# Altium PCB PCB.PcbDoc (part 1 of 3)
Units mm, origin at the board's own origin, x right, y up, seen from the top; angles counter-clockwise.
Board outline 50 x 32.5 mm, 10 copper layers (Top (GND), L2 (HS), L3 (GND), L4 (VCC), L5 (S), L6 S(), L7 (VCC), L8 (GND), L9 (VCC), Bottom (S)), stack 1.18 mm thick; 115 components, 126 nets, 603 pads, 417 vias.
Unrouted connection lines stored in the file: 2.
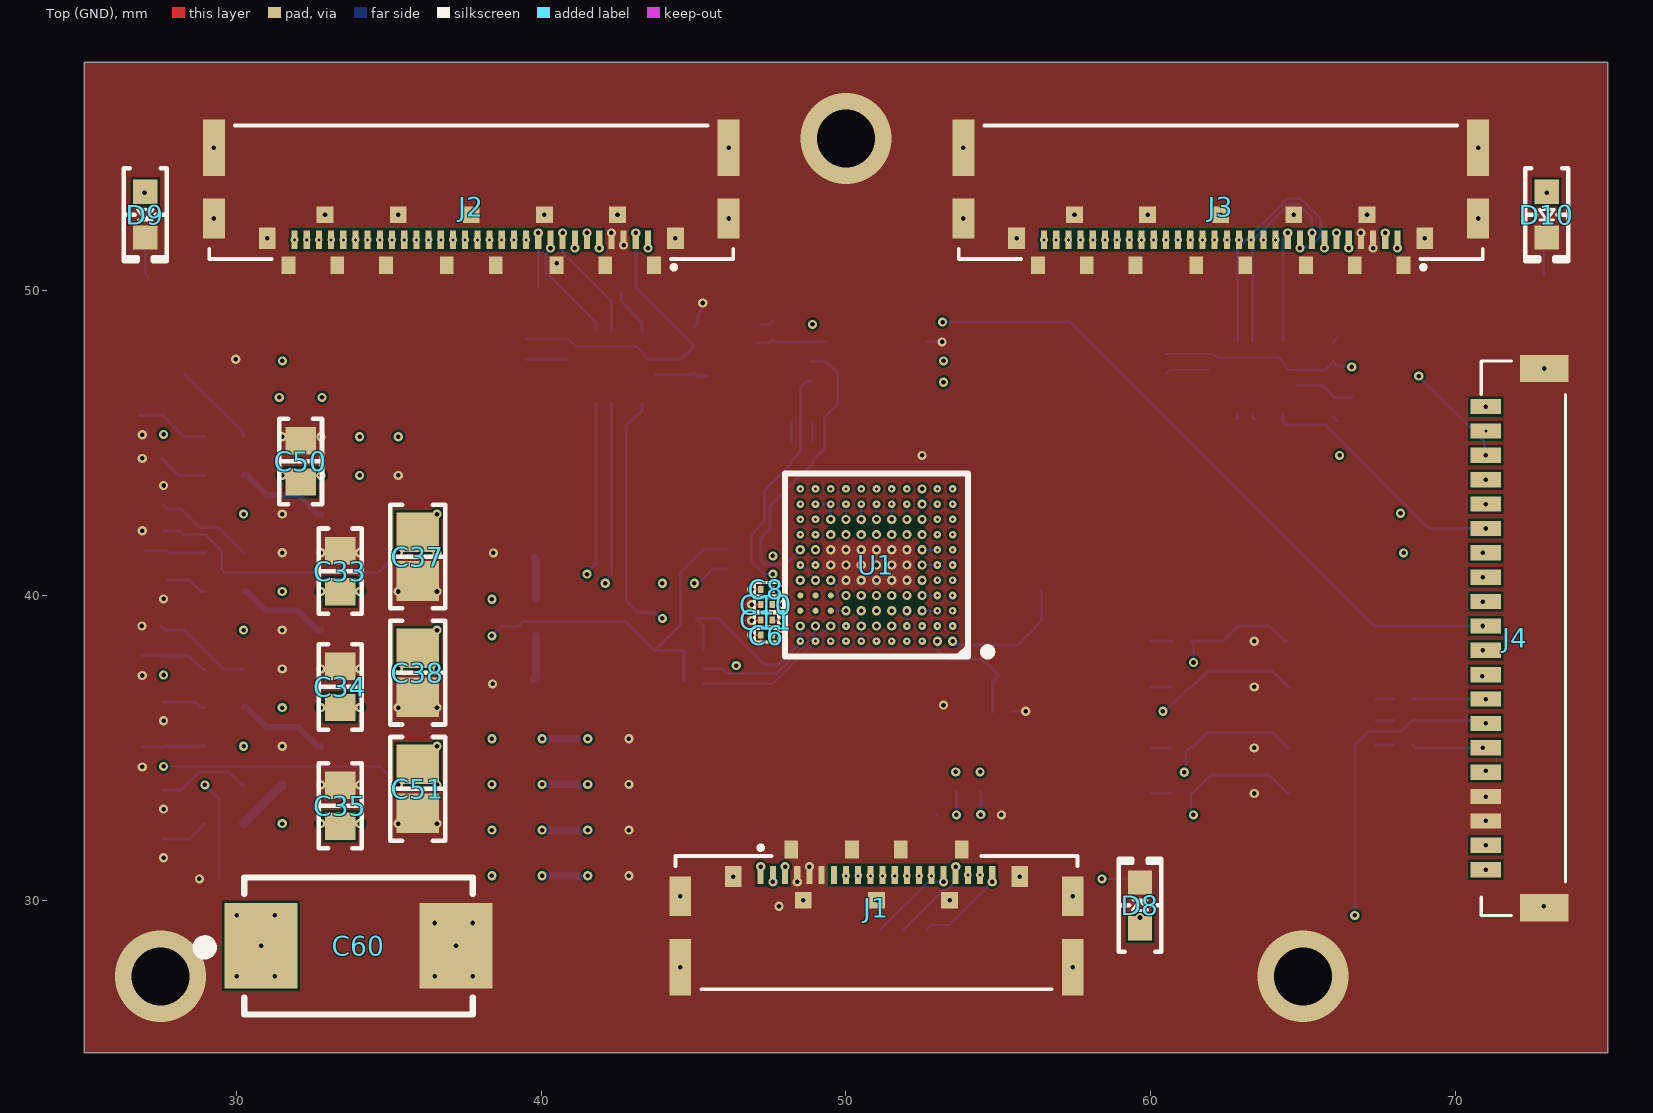
[diagram p0: Top (GND) view]
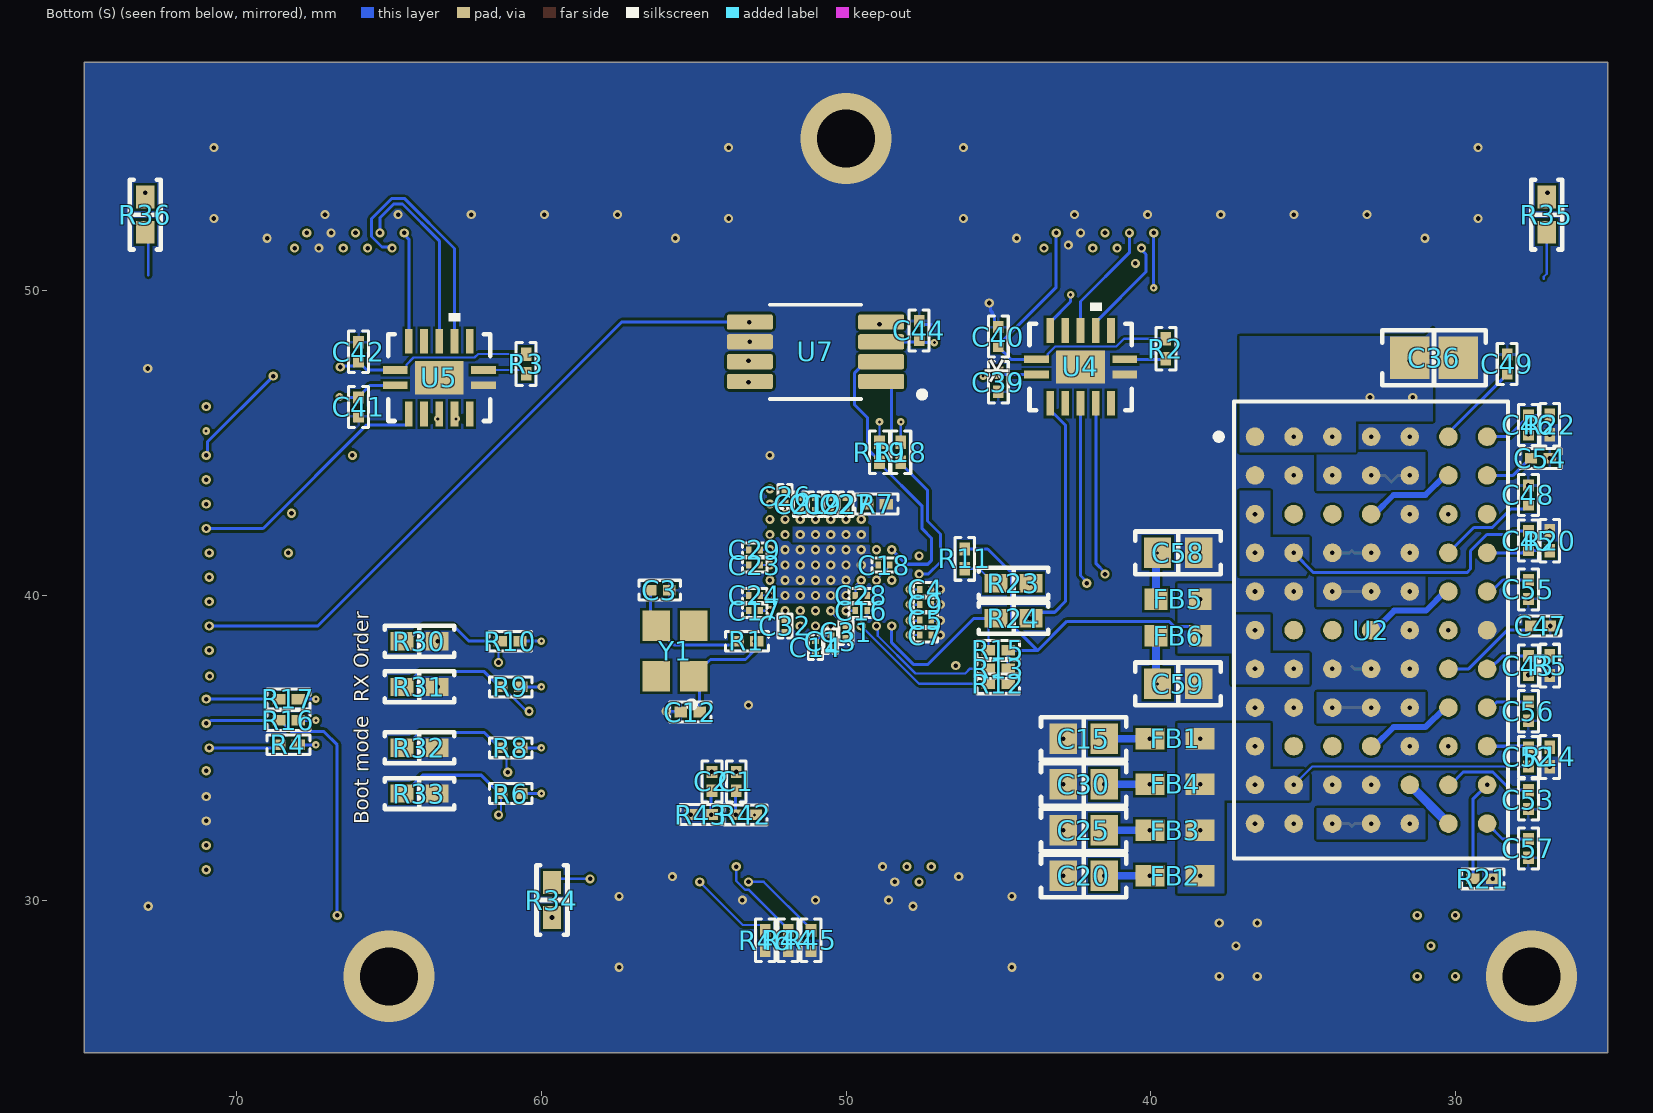
[diagram p1: Bottom (S) view, seen from below]
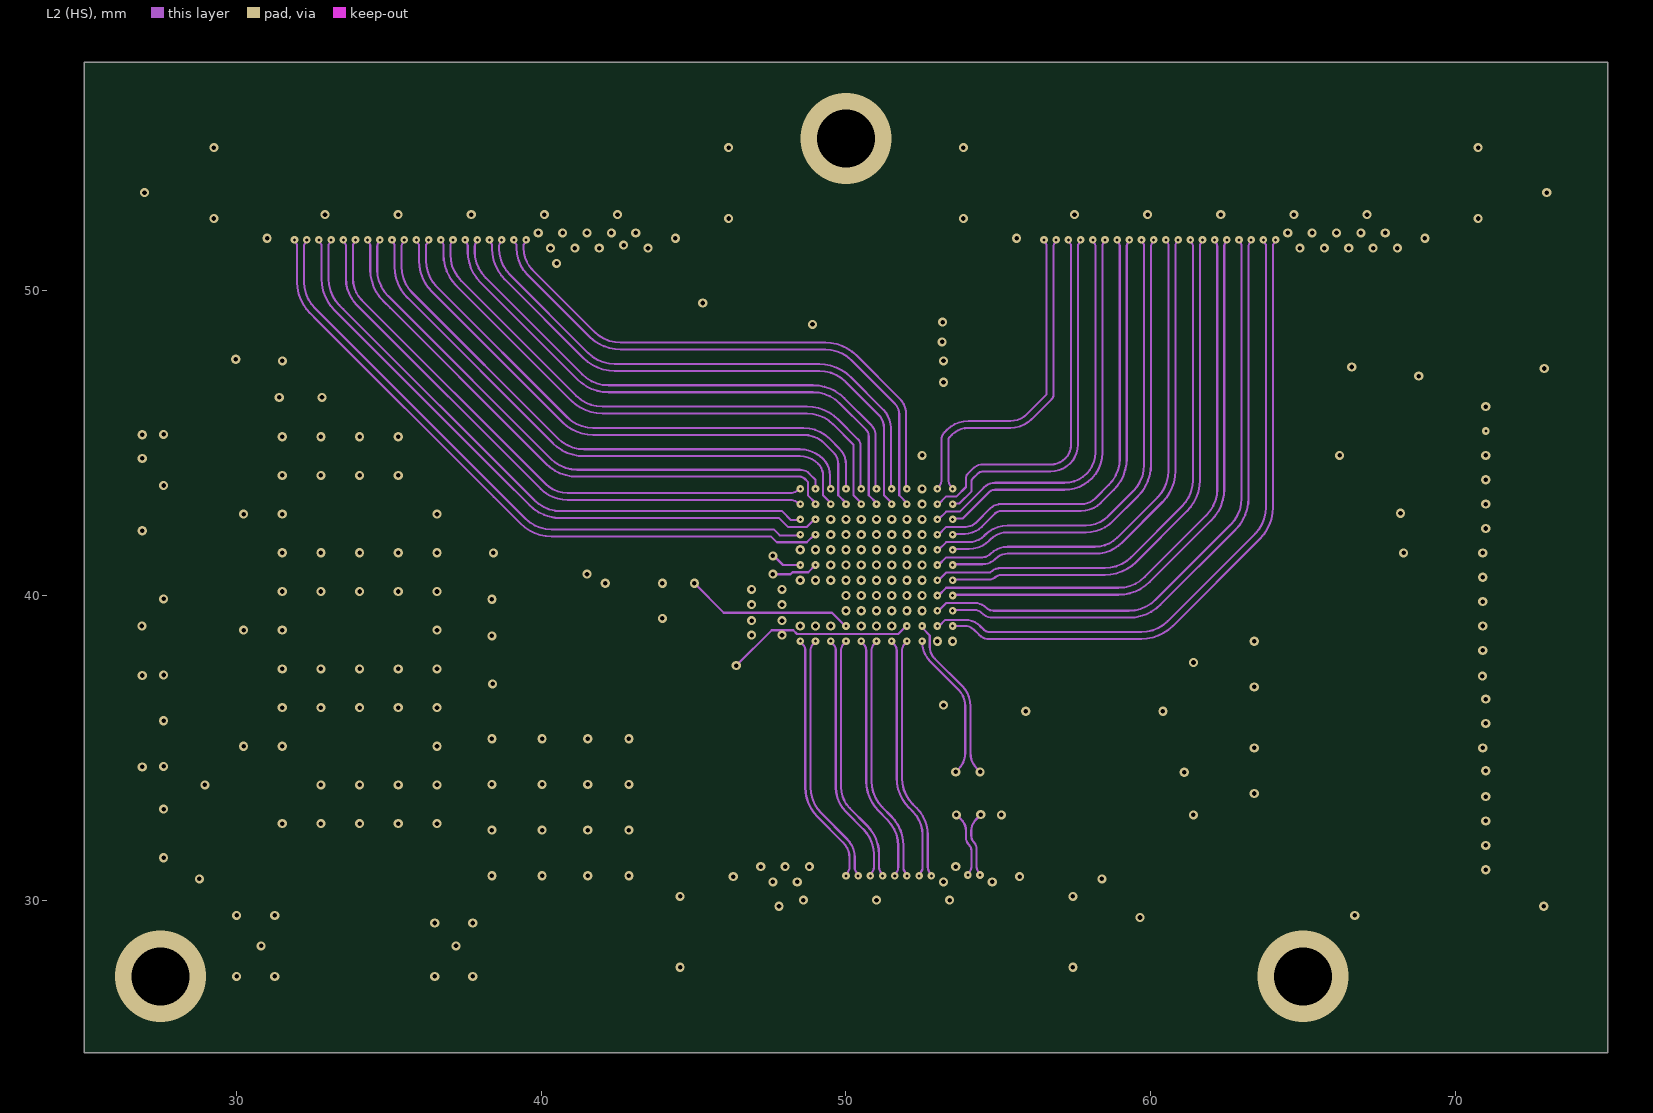
[diagram p2: L2 (HS)]
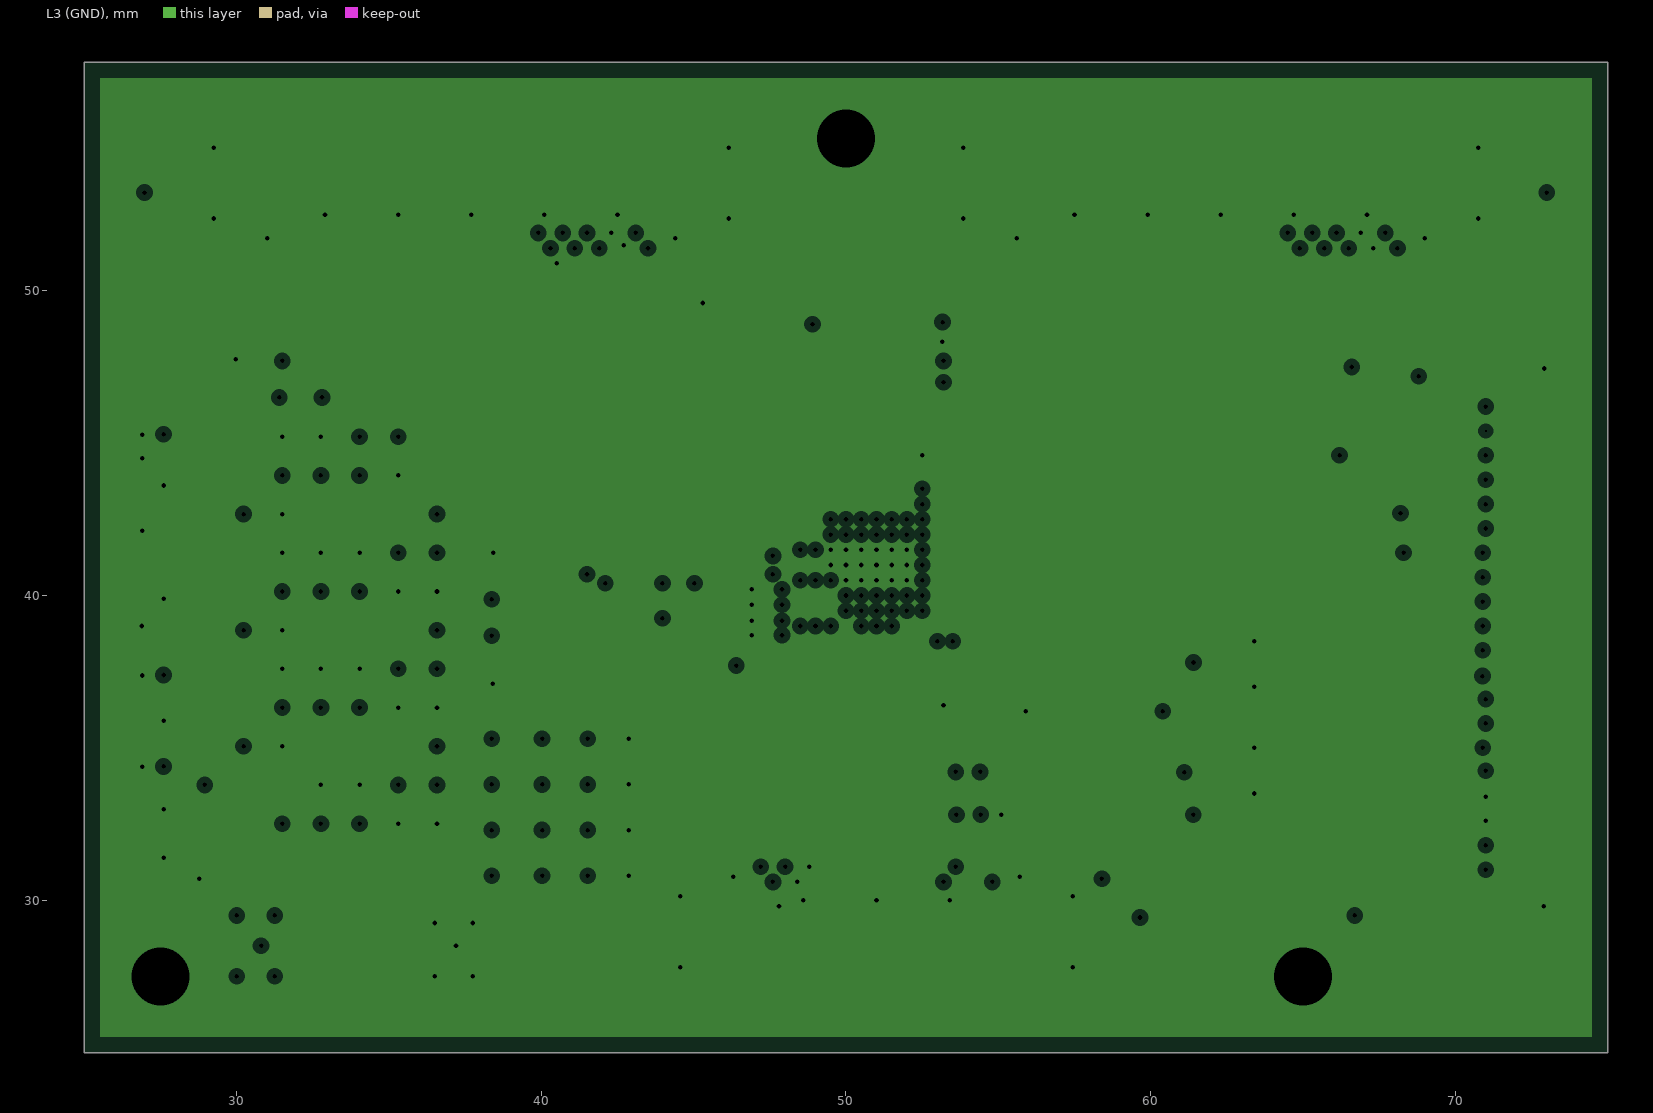
[diagram p3: L3 (GND), clearances drawn from the general rule]
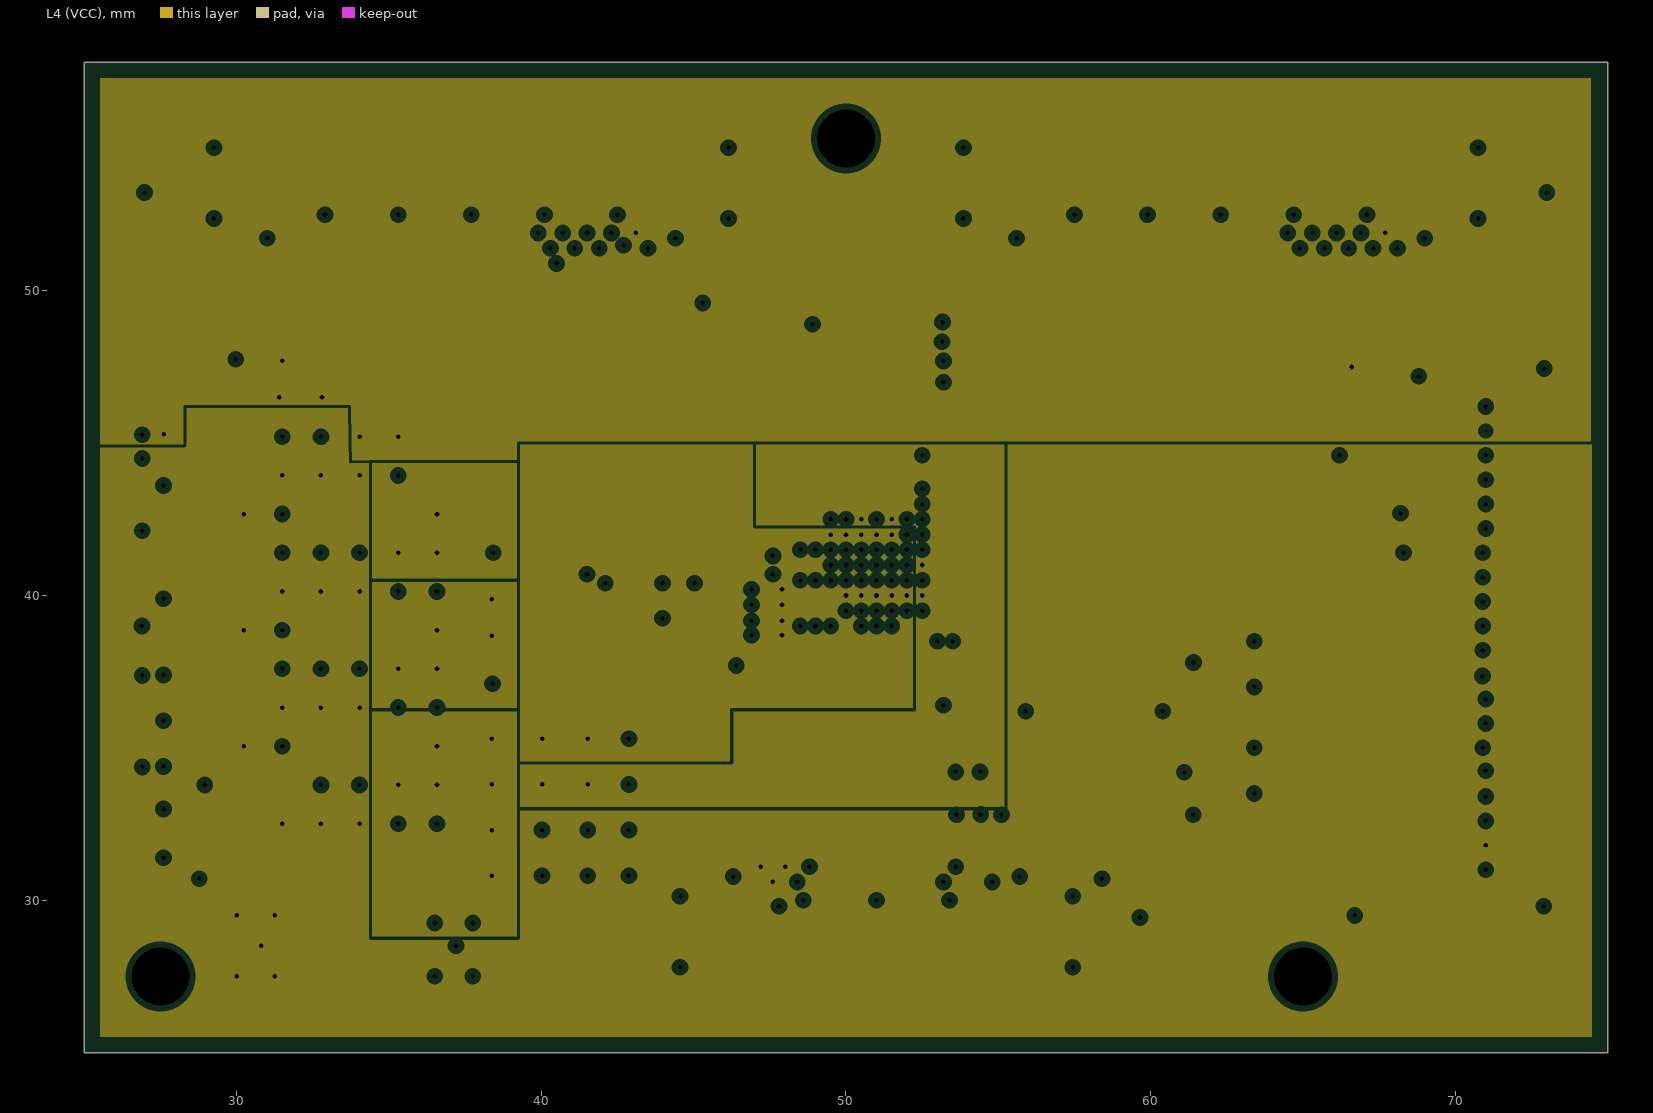
[diagram p4: L4 (VCC), clearances drawn from the general rule]
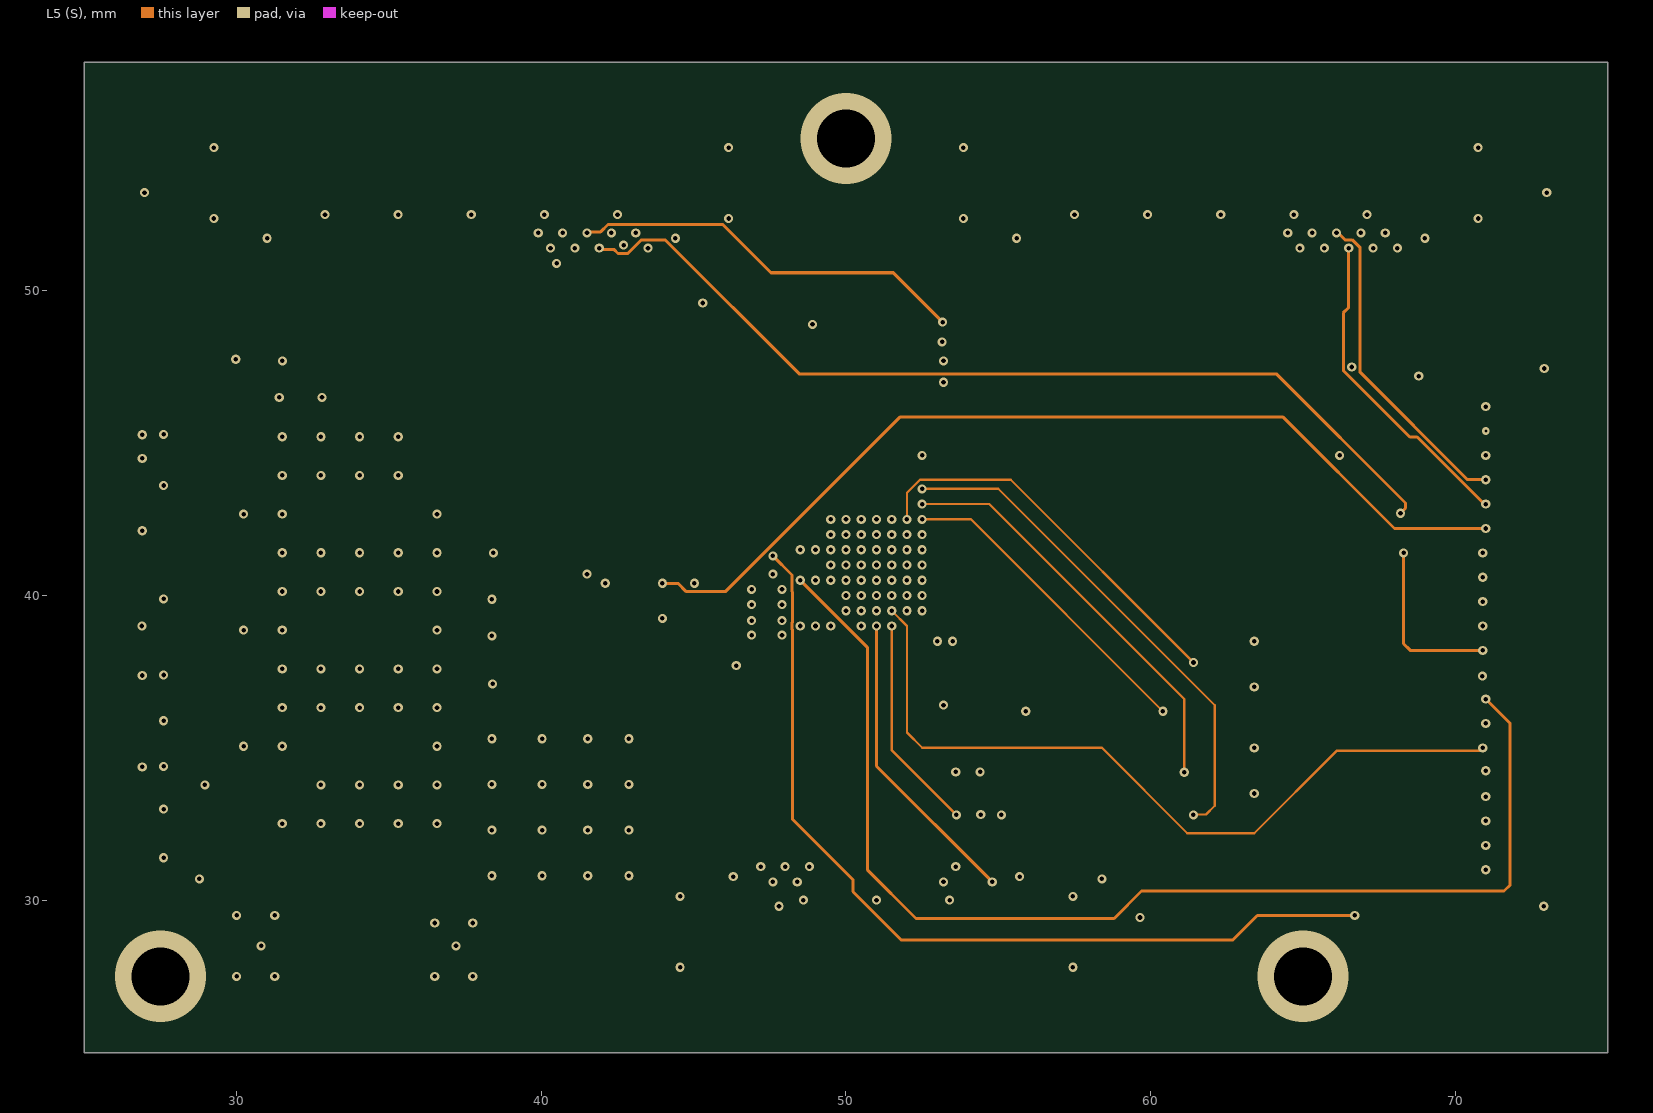
[diagram p5: L5 (S)]
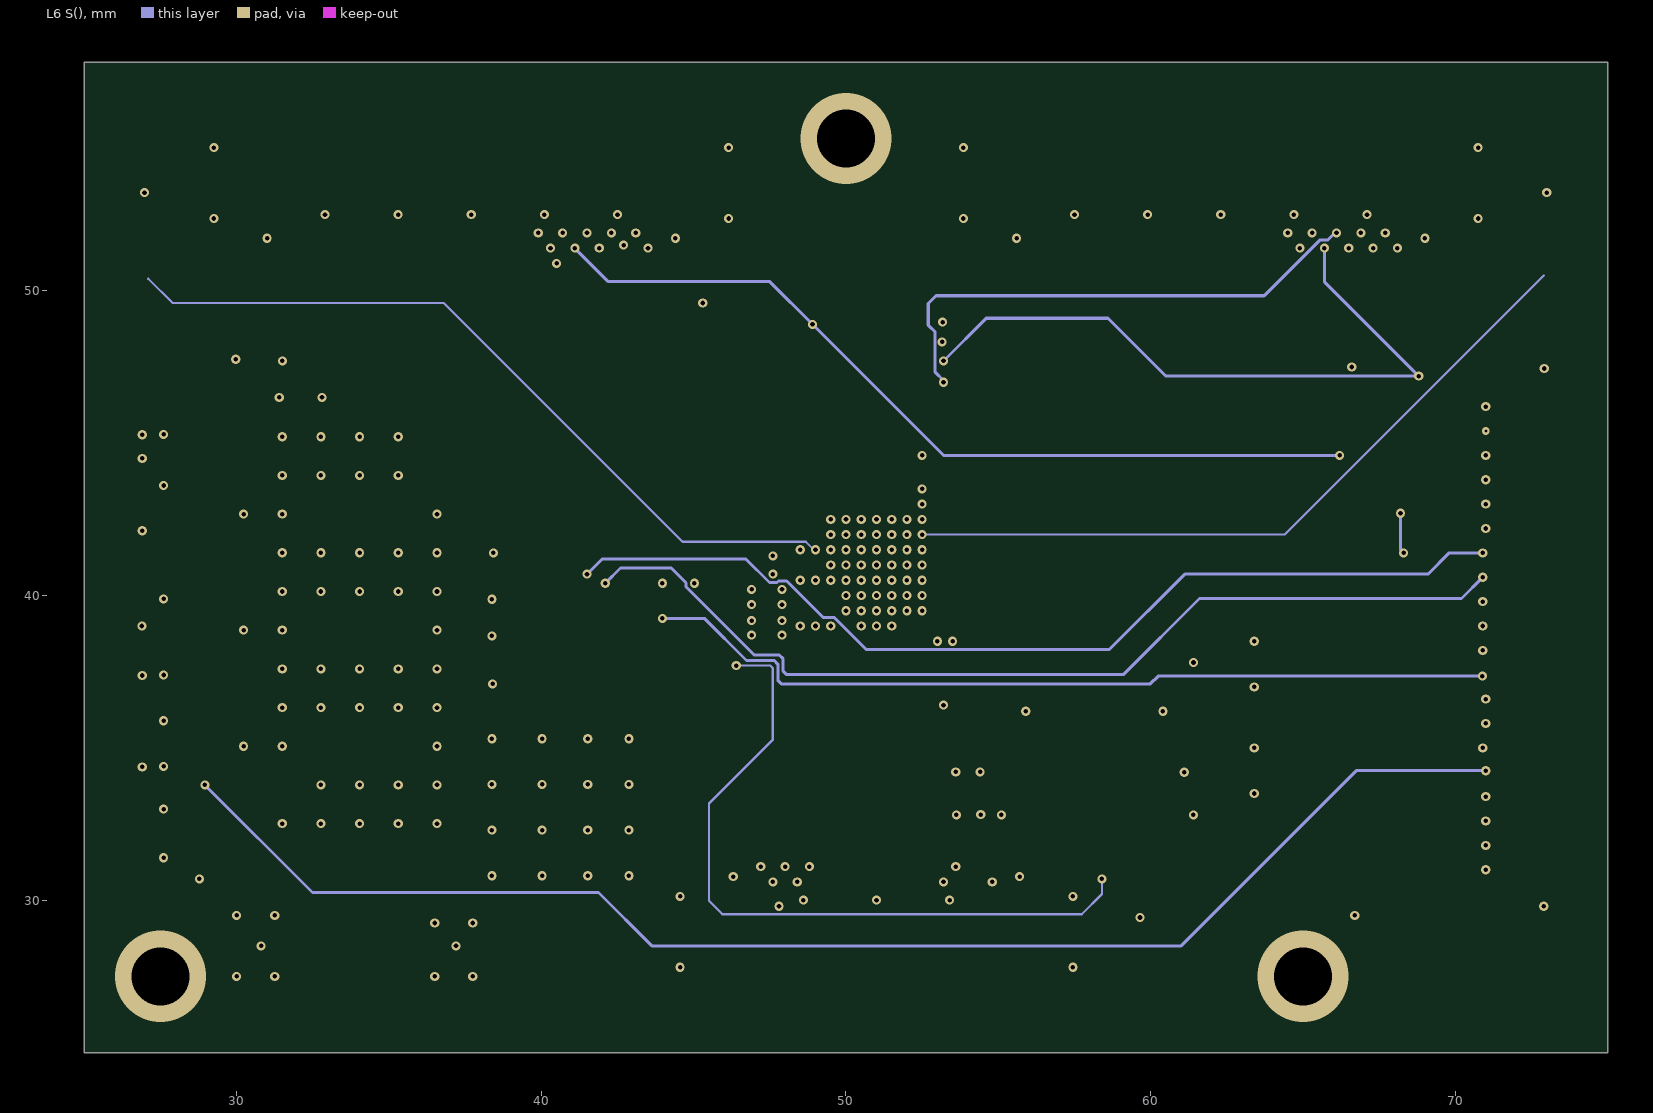
[diagram p6: L6 S()]
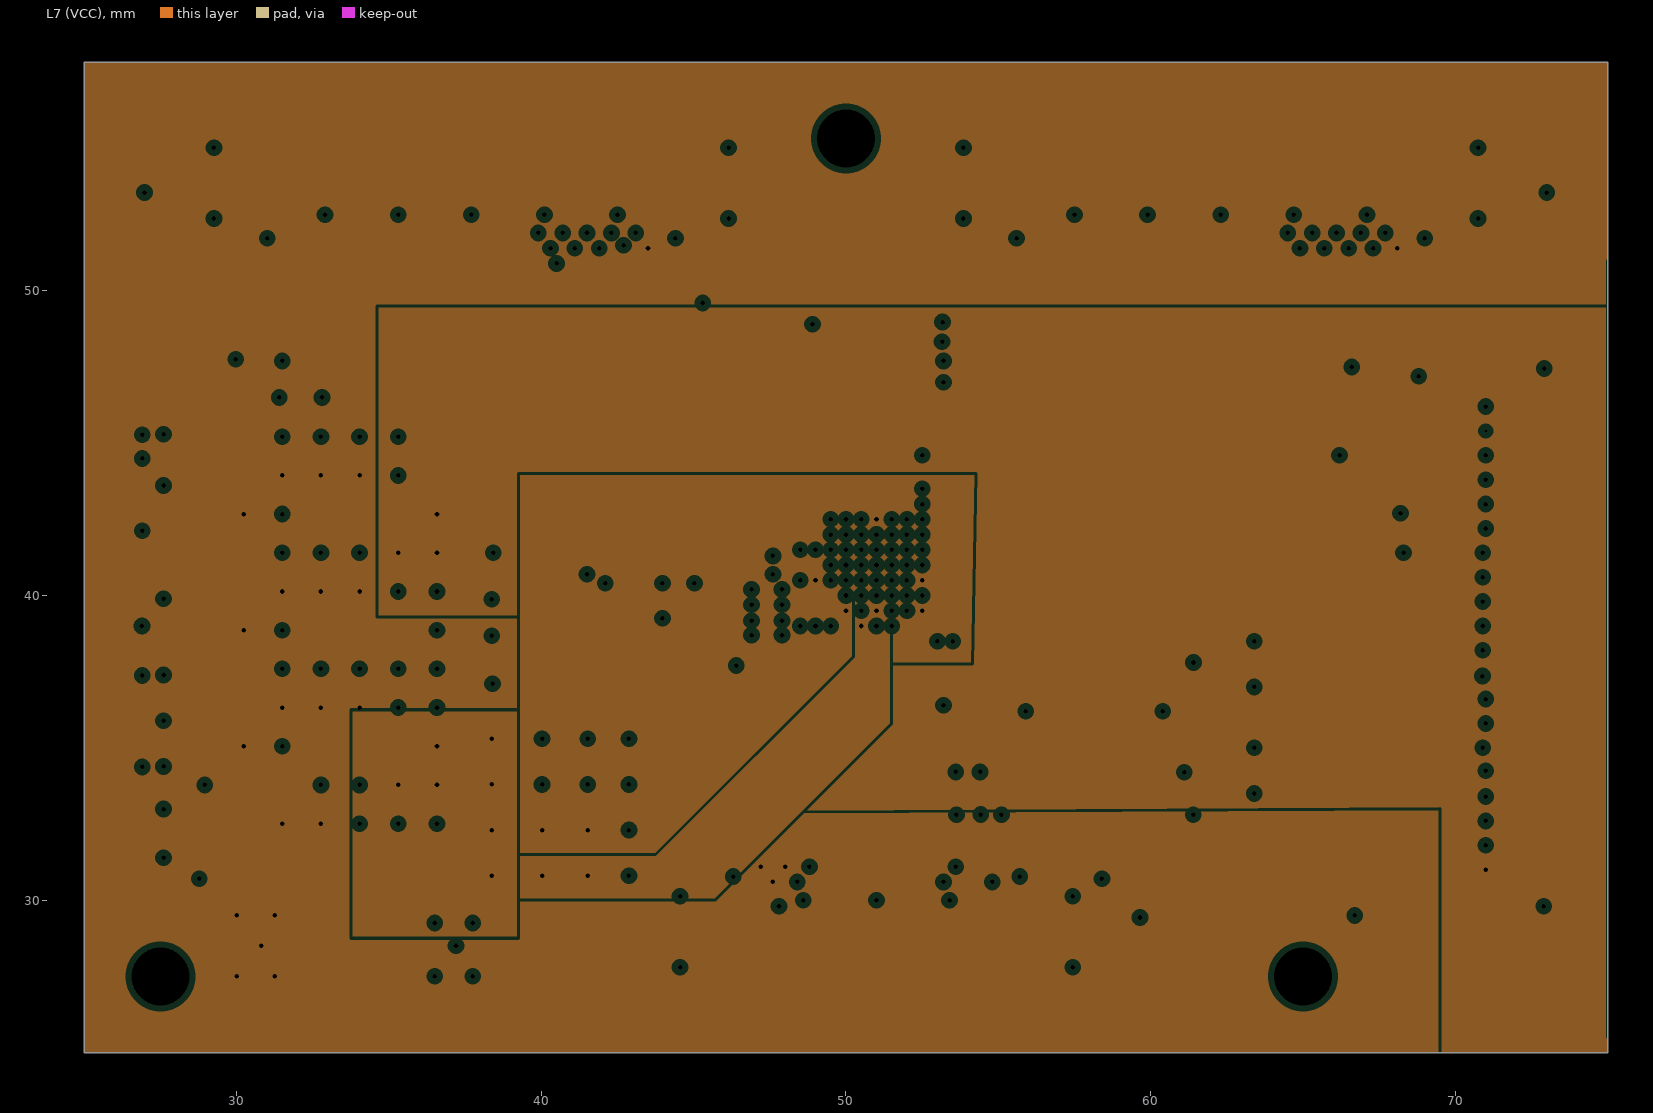
[diagram p7: L7 (VCC), clearances drawn from the general rule]
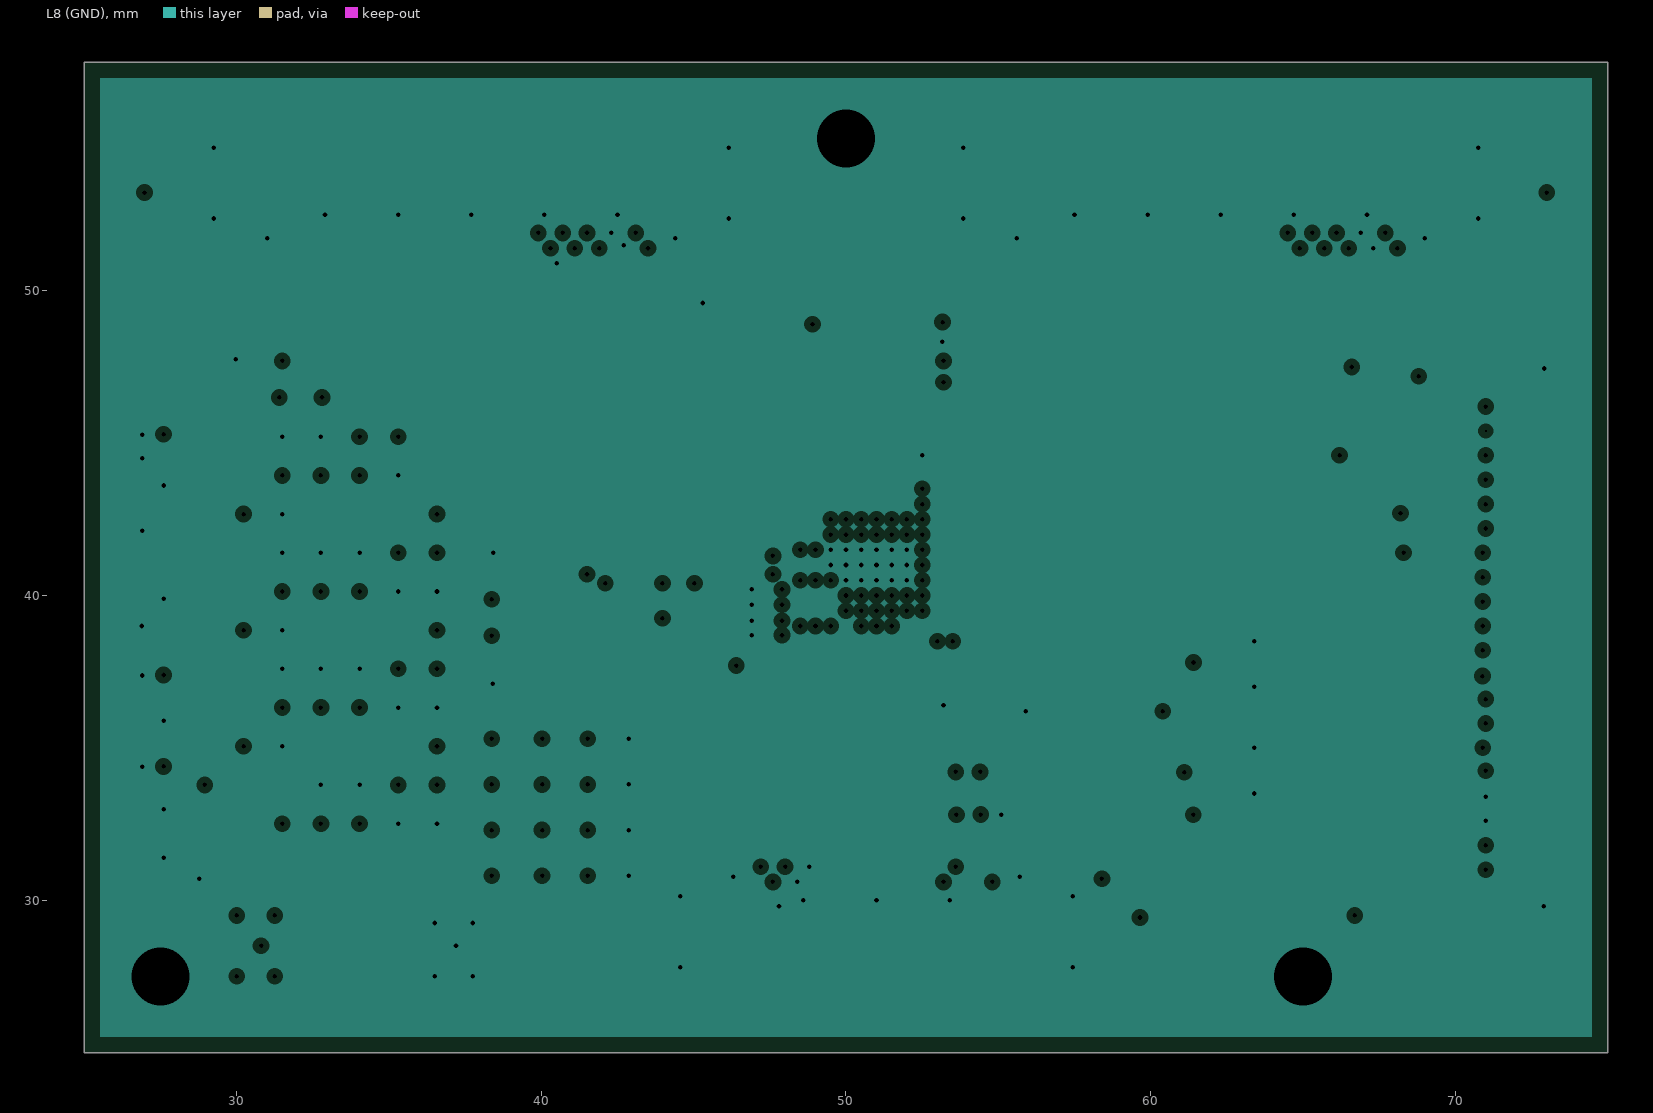
[diagram p8: L8 (GND), clearances drawn from the general rule]
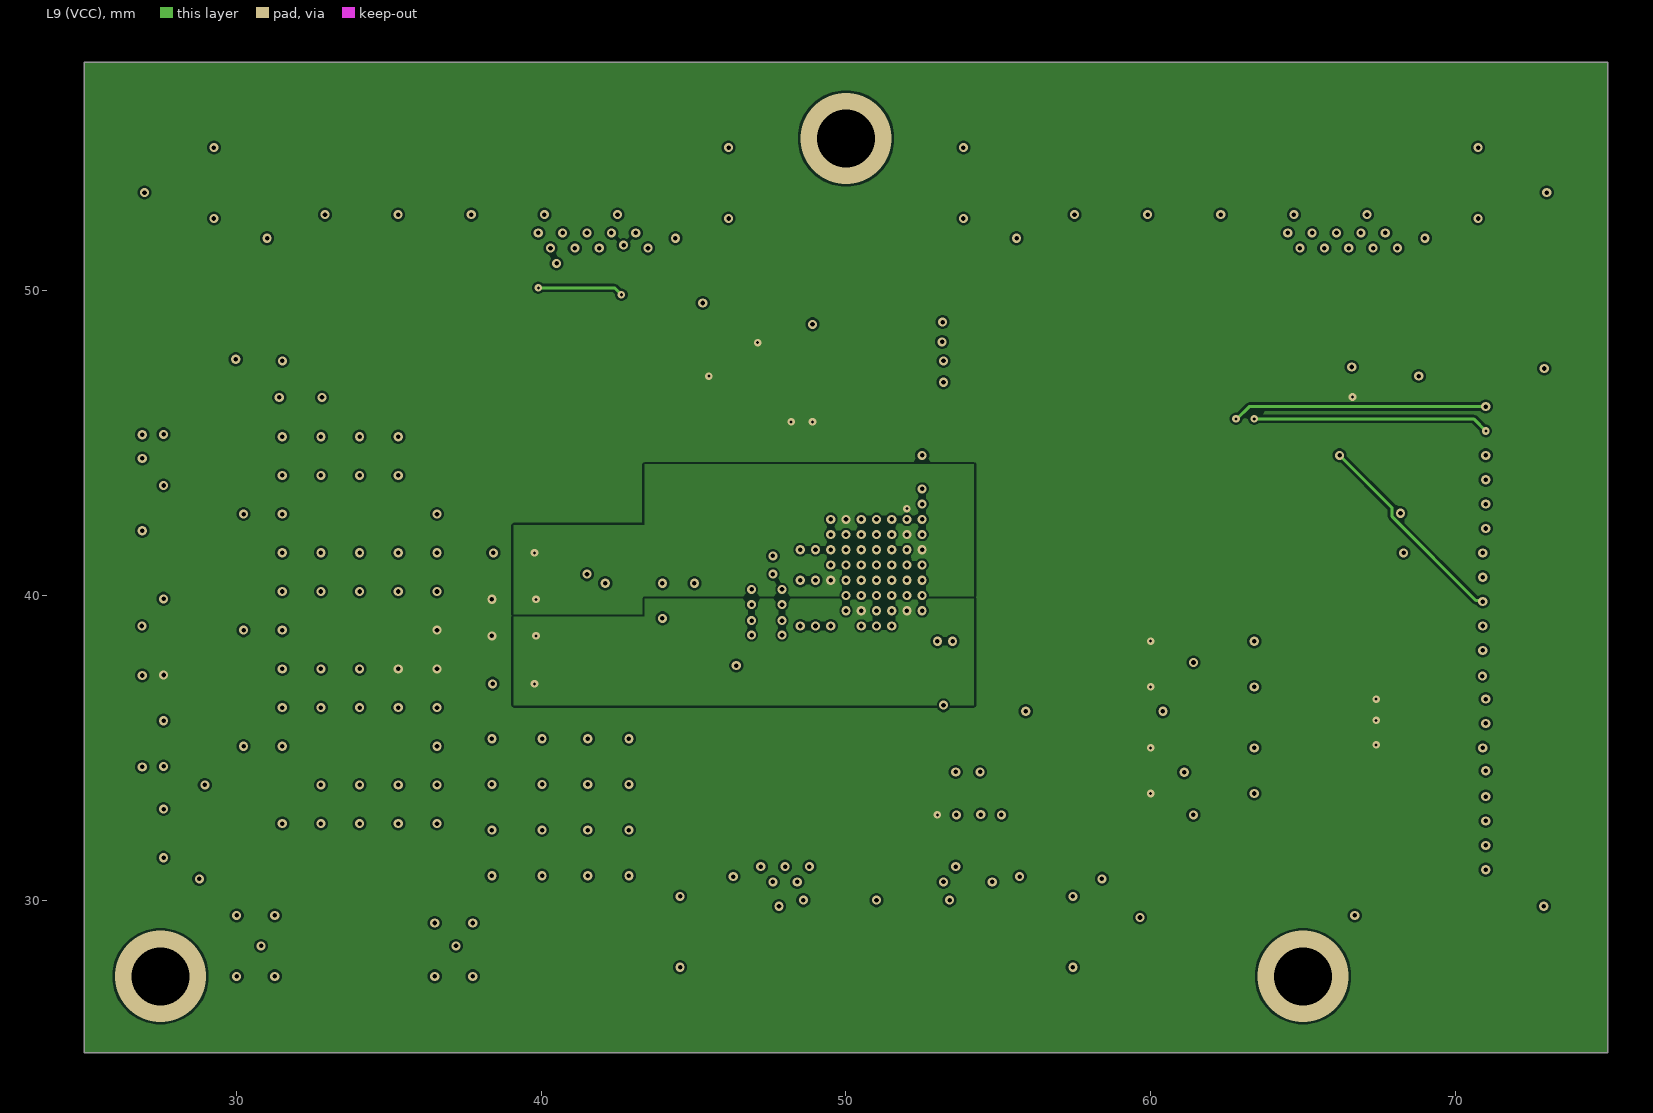
[diagram p9: L9 (VCC)]

## Layer stack, top to bottom
Top Solder: solder mask 0.015, WE-SM-0001, Dk 3.5
Top (GND): signal copper 0.03
Dielectric 1: prepreg 0.1, WE-PP-0034, Dk 3.5
L2 (HS): signal copper 0.03
Dielectric 2: prepreg 0.1, WE-PP-0035, Dk 3.7
L3 (GND): plane copper 0.035, net GND
Core 1: core 0.05, WE-CO-0041, Dk 3.8
L4 (VCC): plane copper 0.035, net (Multiple Nets)
Dielectric 3: prepreg 0.1, WE-PP-0035, Dk 3.7
L5 (S): signal copper 0.035
Dielectric 6: core 0.15, Core-009, Dk 3.8
L6 S(): signal copper 0.035
Dielectric 7: prepreg 0.1, PP-006, Dk 3.7
L7 (VCC): plane copper 0.035, net (Multiple Nets)
Core 2: core 0.05, WE-CO-0041, Dk 3.8
L8 (GND): plane copper 0.035, net GND
Dielectric 4: prepreg 0.1, WE-PP-0035, Dk 3.7
L9 (VCC): signal copper 0.03
Dielectric 5: prepreg 0.1, WE-PP-0034, Dk 3.5
Bottom (S): signal copper 0.03
Bottom Solder: solder mask 0.015, WE-SM-0001, Dk 3.5

## Board outline
25,25 75,25 75,57.5 25,57.5

## Design rules (kind name [scope] priority, off if disabled: settings)
Clearance Clearance_1 [All] p1: gap=0.075 ignorepadtopadclearanceinfootprint=TRUE except(0.3: Arc-Arc Arc-Track Track-Track)
Clearance [All] p2: gap=0.075 ignorepadtopadclearanceinfootprint=TRUE
ComponentClearance [All] p1: gap=0 collisioncheckmode=3 verticalgap=0 showdistances=FALSE
DiffPairsRouting [InDifferentialPairClass('DP')] p1: maxlimit=0.127 minlimit=0.1 mostfreqgap=0.127 toplayer_mingap=0.127 toplayer_minwidth=0.167 toplayer_maxwidth=0.167 toplayer_prefwidth=0.167 midlayer1_maxgap=0.1 midlayer1_prefgap=0.1 midlayer1_minwidth=0.071 midlayer1_maxwidth=0.071 midlayer1_prefwidth=0.071 midlayer2_mingap=0.127 midlayer2_minwidth=0.082 midlayer2_maxwidth=0.082 midlayer2_prefwidth=0.082 midlayer3_mingap=0.127 midlayer3_minwidth=0.083 midlayer3_maxwidth=0.083 midlayer3_prefwidth=0.083 midlayer4_mingap=0.127 midlayer4_minwidth=0.083 midlayer4_maxwidth=0.083 midlayer4_prefwidth=0.083 bottomlayer_mingap=0.127 bottomlayer_minwidth=0.167 bottomlayer_maxwidth=0.167 bottomlayer_prefwidth=0.167 impedanceprofiledriven=TRUE impedanceprofileid={AE4447DF-5068-432C-BB46-7875F6B4D314} impedanceprofilevalue=90.000000 maxuncoupledlength=12.7
DiffPairsRouting DiffPairsRouting_1 [InDifferentialPairClass('MIPI')] p2: maxlimit=0.254 minlimit=0.16 mostfreqgap=0.254 toplayer_maxgap=0.16 toplayer_prefgap=0.16 toplayer_minwidth=0.145 toplayer_maxwidth=0.145 toplayer_prefwidth=0.145 midlayer1_maxgap=0.16 midlayer1_prefgap=0.16 midlayer1_minwidth=0.068 midlayer1_maxwidth=0.068 midlayer1_prefwidth=0.068 midlayer3_maxgap=0.16 midlayer3_prefgap=0.16 midlayer3_minwidth=0.07 midlayer3_maxwidth=0.07 midlayer3_prefwidth=0.07 midlayer4_maxgap=0.16 midlayer4_prefgap=0.16 midlayer4_minwidth=0.07 midlayer4_maxwidth=0.07 midlayer4_prefwidth=0.07 bottomlayer_maxgap=0.16 bottomlayer_prefgap=0.16 bottomlayer_minwidth=0.145 bottomlayer_maxwidth=0.145 bottomlayer_prefwidth=0.145 impedanceprofiledriven=TRUE impedanceprofileid={08CC0214-7819-417F-93F2-0E958FEFD746} impedanceprofilevalue=100.000000 maxuncoupledlength=12.7
HoleSize [All] p1: absolutevalues=TRUE maxlimit=6.35 minlimit=0.15 maxpercent=80.000 minpercent=20.000
HoleToHoleClearance [All] p1: gap=0.1 allowstackedmicrovias=TRUE
MatchedLengths MatchedLengths_3 [All] p1: tolerance=0.127 checknetsindiffpair=TRUE checkdiffpairvsdiffpair=FALSE checkxsignals=FALSE checkothers=FALSE
MatchedLengths MatchedLengths_2 [InDifferentialPairClass('MIPI')] p2: tolerance=12.7 checknetsindiffpair=FALSE checkdiffpairvsdiffpair=TRUE checkxsignals=TRUE checkothers=TRUE
MatchedLengths MatchedLengths_1 [InDifferentialPairClass('DP')] p3: tolerance=0.05 checknetsindiffpair=TRUE checkdiffpairvsdiffpair=FALSE checkxsignals=FALSE checkothers=FALSE
MatchedLengths [InDifferentialPairClass('DP')] p4: tolerance=5 checknetsindiffpair=FALSE checkdiffpairvsdiffpair=TRUE checkxsignals=TRUE checkothers=TRUE
MinimumSolderMaskSliver [All] p1: minsoldermaskwidth=0.075
ParallelSegment ParallelSegment_1 [InNetClass('MIPI') vs InNetClass('MIPI')] p1: limit=2 gap=0.1
ParallelSegment [InNetClass('DP') vs InNetClass('DP')] p2: limit=2 gap=0.1
PlaneClearance PlaneClearance_2 [ViaDiameter <= 0.3] p1: clearance=0.15
PlaneClearance PlaneClearance_1 [ViaSize > 0.4] p2: clearance=0.508
PlaneClearance [All] p3: clearance=0.2
PlaneConnect [All] p1: planeconnectstyle=Direct reliefexpansion=0.508 reliefentries=4 reliefconductorwidth=0.254 reliefairgap=0.254
PolygonConnect PolygonConnect_1 [HasFootprint('CAP 01005_0402') OR HasFootprint('CAP 0201_0603')] p1: connectstyle=Relief reliefconductorwidth=0.1 reliefentries=4 polygonreliefangle="90 Angle" airgapwidth=0.1
PolygonConnect [All] p2: connectstyle=Direct reliefconductorwidth=0.254 reliefentries=4 polygonreliefangle="90 Angle" airgapwidth=0.254
ReturnPath ReturnPath_1 [All] p1: impedanceprofileid={08CC0214-7819-417F-93F2-0E958FEFD746} _gaplimit=0.3 _useantipads=TRUE
ReturnPath [InNetClass('DP')] p2: impedanceprofileid={AE4447DF-5068-432C-BB46-7875F6B4D314} _gaplimit=0.4 _useantipads=TRUE
RoutingVias RoutingVias_1 [IsMicroVia] p1: holewidth=0.1 width=0.325 viastyle="Through Hole" minholewidth=0.1 minwidth=0.25 maxholewidth=0.1 maxwidth=0.325
RoutingVias [All] p2: holewidth=0.2 width=0.4 viastyle="Through Hole" minholewidth=0.15 minwidth=0.3 maxholewidth=0.25 maxwidth=0.5
SolderMaskExpansion [All] p1: expansion=0.05 istentingtop=FALSE
UnRoutedNet [All] p1: checkbadconnections=TRUE
ViasUnderSMD [All] p1: allowed=TRUE
Width [All] p1: maxlimit=1 minlimit=0.075 preferedwidth=0.1
22 further rules are at their usual default settings.

## Classes and differential pairs
differential pair class MIPI: TX0_D0_0 TX0_D0_1 TX0_D0_2 TX0_D0_3 TX0_D0_C TX0_D1_0 TX0_D1_1 TX0_D1_2 TX0_D1_3 TX0_D1_C TX1_D0_0 TX1_D0_1 TX1_D0_2 TX1_D0_3 TX1_D0_C TX1_D1_0 TX1_D1_1 TX1_D1_2 TX1_D1_3 TX1_D1_C
differential pair class DP: AUX DP0 DP1 DP2 DP3 RX_AUX
net class MIPI: TX0_D0_0_N TX0_D0_0_P TX0_D0_1_N TX0_D0_1_P TX0_D0_2_N TX0_D0_2_P TX0_D0_3_N TX0_D0_3_P TX0_D0_C_N TX0_D0_C_P TX0_D1_0_N TX0_D1_0_P TX0_D1_1_N TX0_D1_1_P TX0_D1_2_N TX0_D1_2_P TX0_D1_3_N TX0_D1_3_P TX0_D1_C_N TX0_D1_C_P TX1_D0_0_N TX1_D0_0_P TX1_D0_1_N TX1_D0_1_P TX1_D0_2_N TX1_D0_2_P TX1_D0_3_N TX1_D0_3_P TX1_D0_C_N TX1_D0_C_P TX1_D1_0_N TX1_D1_0_P TX1_D1_1_N TX1_D1_1_P TX1_D1_2_N TX1_D1_2_P TX1_D1_3_N TX1_D1_3_P TX1_D1_C_N TX1_D1_C_P
net class DP: AUX_N AUX_P DP0_N DP0_P DP1_N DP1_P DP2_N DP2_P DP3_N DP3_P RX_AUX_N RX_AUX_P
component class TX1: C41 C42 J3 R3 U5
component class TX0: C39 C40 J2 R2 R7 U4
component class Supplies_LTM4643: C33 C34 C35 C36 C37 C38 C43 C45 C46 C47 C48 C49 C50 C51 C52 C53 C54 C55 C56 C57 C60 R5 R14 R20 R21 R22 U2
component class RX_DP: C1 C2 J1 R42 R43 R44 R45 R46 U1
component class PDN: C4 C5 C6 C7 C8 C9 C10 C11 C13 C14 C15 C16 C17 C18 C19 C20 C21 C22 C23 C24 C25 C26 C27 C28 C29 C30 C31 C32 C58 C59 FB1 FB2 FB3 FB4 FB5 FB6
component class MCUConn: J4
component class Control: C3 C12 C44 D8 D9 D10 R1 R4 R6 R8 R9 R10 R11 R12 R13 R15 R16 R17 R18 R19 R23 R24 R30 R31 R32 R33 R34 R35 R36 U7 Y1
differential pair RX_AUX: +RX_AUX_P -RX_AUX_N
differential pair TX1_D1_C: +TX1_D1_C_P -TX1_D1_C_N
differential pair TX1_D1_3: +TX1_D1_3_P -TX1_D1_3_N
differential pair TX1_D1_2: +TX1_D1_2_P -TX1_D1_2_N
differential pair TX1_D1_1: +TX1_D1_1_P -TX1_D1_1_N
differential pair TX1_D1_0: +TX1_D1_0_P -TX1_D1_0_N
differential pair TX1_D0_C: +TX1_D0_C_P -TX1_D0_C_N
differential pair TX1_D0_3: +TX1_D0_3_P -TX1_D0_3_N
differential pair TX1_D0_2: +TX1_D0_2_P -TX1_D0_2_N
differential pair TX1_D0_1: +TX1_D0_1_P -TX1_D0_1_N
differential pair TX1_D0_0: +TX1_D0_0_P -TX1_D0_0_N
differential pair TX0_D1_C: +TX0_D1_C_P -TX0_D1_C_N
differential pair TX0_D1_3: +TX0_D1_3_P -TX0_D1_3_N
differential pair TX0_D1_2: +TX0_D1_2_P -TX0_D1_2_N
differential pair TX0_D1_1: +TX0_D1_1_P -TX0_D1_1_N
differential pair TX0_D1_0: +TX0_D1_0_P -TX0_D1_0_N
differential pair TX0_D0_C: +TX0_D0_C_P -TX0_D0_C_N
differential pair TX0_D0_3: +TX0_D0_3_P -TX0_D0_3_N
differential pair TX0_D0_2: +TX0_D0_2_P -TX0_D0_2_N
differential pair TX0_D0_1: +TX0_D0_1_P -TX0_D0_1_N
differential pair TX0_D0_0: +TX0_D0_0_P -TX0_D0_0_N
differential pair DP3: +DP3_P -DP3_N
differential pair DP2: +DP2_P -DP2_N
differential pair DP1: +DP1_P -DP1_N
differential pair DP0: +DP0_P -DP0_N
differential pair AUX: +AUX_P -AUX_N

## Components (designator, comment, footprint, x,y, rotation, side; value= is the part's Value field where it differs from the comment)
C1 "0.1 µF" "CAP 0201_0603" 53.6,33.9 r90 bottom
C2 "0.1 µF" "CAP 0201_0603" 54.4,33.9 r90 bottom
C3 "10 pF" "CAP 0201_0603" 56.112,40.175 r180 bottom
C4 "0.1 µF" "CAP 01005_0402" 47.39,40.2 r0 bottom
C5 "0.1 µF" "CAP 01005_0402" 47.39,39.2 r0 bottom
C6 "0.1 µF" "CAP 01005_0402" 47.39,38.7 r0 top
C7 "0.1 µF" "CAP 01005_0402" 47.39,38.7 r0 bottom
C8 "0.1 µF" "CAP 01005_0402" 47.39,40.2 r0 top
C9 "0.1 µF" "CAP 01005_0402" 47.39,39.7 r0 bottom
C10 "0.1 µF" "CAP 01005_0402" 47.39,39.7 r0 top
C11 "0.1 µF" "CAP 01005_0402" 47.39,39.2 r0 top
C12 "10 pF" "CAP 0201_0603" 55.112,36.175 r0 bottom
C13 "0.1 µF" "CAP 01005_0402" 50.5,38.5 r90 bottom
C14 "0.1 µF" "CAP 01005_0402" 51,38.3 r90 bottom
C15 "10 µF" "CAP 0603_1608" 42.2,35.3 r180 bottom
C16 "0.1 µF" "CAP 01005_0402" 49.5,39.5 r0 bottom
C17 "0.1 µF" "CAP 01005_0402" 53,39.5 r180 bottom
C18 "0.1 µF" "CAP 01005_0402" 48.75,41 r180 bottom
C19 "0.1 µF" "CAP 01005_0402" 51,43 r270 bottom
C20 "10 µF" "CAP 0603_1608" 42.2,30.8 r180 bottom
C21 "0.1 µF" "CAP 01005_0402" 51.5,43 r270 bottom
C22 "0.1 µF" "CAP 01005_0402" 50.5,43 r270 bottom
C23 "0.1 µF" "CAP 01005_0402" 53,41 r180 bottom
C24 "0.1 µF" "CAP 01005_0402" 53,40 r180 bottom
C25 "10 µF" "CAP 0603_1608" 42.2,32.3 r180 bottom
C26 "0.1 µF" "CAP 01005_0402" 52,43.25 r270 bottom
C27 "0.1 µF" "CAP 01005_0402" 50,43 r270 bottom
C28 "0.1 µF" "CAP 01005_0402" 49.5,40 r0 bottom
C29 "0.1 µF" "CAP 01005_0402" 53,41.5 r180 bottom
C30 "10 µF" "CAP 0603_1608" 42.2,33.8 r180 bottom
C31 "0.1 µF" "CAP 01005_0402" 50,38.8 r90 bottom
C32 "0.1 µF" "CAP 01005_0402" 52,39 r90 bottom
C33 "10 µF" "CAP 0603_1608" 33.4,40.8 r270 top
C34 "10 µF" "CAP 0603_1608" 33.4,37 r270 top
C35 "10 µF" "CAP 0603_1608" 33.4,33.1 r270 top
C36 "100 µF" "CAP 0805_2012" 30.7,47.8 r0 bottom
C37 "100 µF" "CAP 0805_2012" 35.941,41.275 r90 top
C38 "100 µF" "CAP 0805_2012" 35.941,37.465 r90 top
C39 "0.1 µF" "CAP 0201_0603" 45,47 r90 bottom
C40 "0.1 µF" "CAP 0201_0603" 45,48.5 r270 bottom
C41 "0.1 µF" "CAP 0201_0603" 66,46.19 r90 bottom
C42 "0.1 µF" "CAP 0201_0603" 66,48 r270 bottom
C43 "20 pF" "CAP 0201_0603" 27.6,37.7 r270 bottom
C44 "0.1 µF" "CAP 0201_0603" 47.6,48.7 r270 bottom
C45 "20 pF" "CAP 0201_0603" 27.6,41.8 r90 bottom
C46 "20 pF" "CAP 0201_0603" 27.6,45.6 r270 bottom
C47 "0.1 µF" "CAP 0201_0603" 27.2,39 r0 bottom
C48 "0.1 µF" "CAP 0201_0603" 27.6,43.3 r270 bottom
C49 "0.1 µF" "CAP 0201_0603" 28.3,47.6 r270 bottom
C50 "10 µF" "CAP 0603_1608" 32.1,44.4 r270 top
C51 "100 µF" "CAP 0805_2012" 35.941,33.655 r90 top
C52 "20 pF" "CAP 0201_0603" 27.6,34.7 r270 bottom
C53 "0.1 µF" "CAP 0201_0603" 27.6,33.3 r90 bottom
C54 "10 pF" "CAP 0201_0603" 27.21,44.5 r0 bottom
C55 "10 pF" "CAP 0201_0603" 27.6,40.2 r90 bottom
C56 "10 pF" "CAP 0201_0603" 27.6,36.2 r90 bottom
C57 "10 pF" "CAP 0201_0603" 27.6,31.7 r90 bottom
C58 "10 µF" "CAP 0603_1608" 39.1,41.4 r0 bottom
C59 "10 µF" "CAP 0603_1608" 39.1,37.1 r0 bottom
C60 "220uF" WCAP-PHGP_L7.3W4.3H1.9 34,28.5 r180 top
D8 "Green" "LED 0603_1608 GREEN" 59.65,29.83 r90 top
D9 "Green" "LED 0603_1608 GREEN" 27,52.5 r270 top
D10 "Green" "LED 0603_1608 GREEN" 73,52.5 r270 top
FB1 "60Ohm, 3A" "WE-CBF_0603_High Current" 39.2,35.3 r0 bottom
FB2 "60Ohm, 3A" "WE-CBF_0603_High Current" 39.2,30.8 r0 bottom
FB3 "60Ohm, 3A" "WE-CBF_0603_High Current" 39.2,32.3 r0 bottom
FB4 "60Ohm, 3A" "WE-CBF_0603_High Current" 39.2,33.8 r0 bottom
FB5 "1000Ohm, 0.83A" WE-CBF_0603 39.1,39.875 r0 bottom
FB6 "1000Ohm, 0.83A" WE-CBF_0603 39.1,38.675 r0 bottom
J1 "20682-020E-02" IPEX_20682-020E-02 51,30.825 r0 top
J2 "20682-030E-02" IPEX_20682-030E-02 37.7,51.675 r180 top
J3 "20682-030E-02" IPEX_20682-030E-02 62.3,51.675 r180 top
J4 "DF52-20S-0.8H" DF5220S08H 72.11,38.6 r90 top
R1 "1 MOhms" "RES 0201_0603" 53.25,38.5 r0 bottom
R2 "2.7 kOhms" "RES 0201_0603" 39.5,48.1 r270 bottom
R3 "2.7 kOhms" "RES 0201_0603" 60.5,47.6 r270 bottom
R4 "100 kOhms" "RES 0201_0603" 68.3,35.1 r180 bottom
R5 "13.3 kOhms" "RES 0201_0603" 26.9,37.7 r90 bottom
R6 "2.7 kOhms" "RES 0201_0603" 61,33.5 r180 bottom
R7 "15 kOhms" "RES 0201_0603" 49,43 r0 bottom
R8 "2.7 kOhms" "RES 0201_0603" 61,35 r180 bottom
R9 "2.7 kOhms" "RES 0201_0603" 61,37 r180 bottom
R10 "2.7 kOhms" "RES 0201_0603" 61.025,38.5 r180 bottom
R11 "2.7 kOhms" "RES 0201_0603" 46.1,41.2 r90 bottom
R12 "2.7 kOhms" "RES 0201_0603" 45,37.1 r180 bottom
R13 "2.7 kOhms" "RES 0201_0603" 45,37.6 r180 bottom
R14 "90.9 kOhms" "RES 0201_0603" 26.9,34.7 r90 bottom
R15 "2.7 kOhms" "RES 0201_0603" 45,38.2 r180 bottom
R16 "2.7 kOhms" "RES 0201_0603" 68.3,35.9 r180 bottom
R17 "2.7 kOhms" "RES 0201_0603" 68.3,36.6 r180 bottom
R18 "2.7 kOhms" "RES 0201_0603" 48.2,44.7 r90 bottom
R19 "2.7 kOhms" "RES 0201_0603" 48.9,44.7 r90 bottom
R20 "60.4 kOhms" "RES 0201_0603" 26.9,41.8 r270 bottom
R21 "2.7 kOhms" "RES 0201_0603" 29.1,30.7 r180 bottom
R22 "30.1 kOhms" "RES 0201_0603" 26.9,45.6 r90 bottom
R23 "0 Ohms" "RES 0402_1005" 44.5,40.4 r0 bottom
R24 "0 Ohms" "RES 0402_1005" 44.5,39.25 r0 bottom
R30 "0 Ohms" "RES 0402_1005" 64,38.5 r0 bottom
R31 "0 Ohms" "RES 0402_1005" 64,37 r0 bottom
R32 "0 Ohms" "RES 0402_1005" 64,35 r0 bottom
R33 "0 Ohms" "RES 0402_1005" 64,33.5 r0 bottom
R34 "680 Ohms" "RES 0402_1005" 59.65,30.005 r270 bottom
R35 "680 Ohms" "RES 0402_1005" 27,52.5 r90 bottom
R36 "680 Ohms" "RES 0402_1005" 73,52.5 r90 bottom
R42 "1 MOhms" "RES 0201_0603" 53.3,32.8 r180 bottom
R43 "1 MOhms" "RES 0201_0603" 54.75,32.81 r180 bottom
R44 "1 MOhms" "RES 0201_0603" 51.9,28.68 r90 bottom
R45 "1 MOhms" "RES 0201_0603" 51.15,28.68 r90 bottom
R46 "100 kOhms" "RES 0201_0603" 52.65,28.68 r90 bottom
U1 "VXR7200" BGA100P9X9-81A 51,41 r180 top
U2 "LTM4643EY#PBF" BGA77C127P7X11_1500X900X262 32.766,38.862 r180 bottom
U4 "TXU0204BQAR" WQFN_04BQAR_TEX 42.3,47.5 r90 bottom
U5 "TXU0204BQAR" WQFN_04BQAR_TEX 63.348,47.15 r90 bottom
U7 "PCA9540BDP" SOP65P490X110-8N 51,48 r0 bottom
Y1 "27MHz" WE-XTAL_CFPX-218 55.612,38.175 r90 bottom

## Footprints (in the part's own frame and the unit in brackets; to place one, negate y for a bottom-side part, rotate by r counter-clockwise, add the part's x,y. Pads: shape width x height; smd on the part's side, far side on the other; paste and mask are expansions set on the pad)
BGA77C127P7X11_1500X900X262 [mm]
  round 0.61 smd: A1(-3.81,6.35) A2(-2.54,6.35) A3(-1.27,6.35) A4(0,6.35) A5(1.27,6.35) A6(2.54,6.35) A7(3.81,6.35) B1(-3.81,5.08) B2(-2.54,5.08) B3(-1.27,5.08) B4(0,5.08) B5(1.27,5.08) B6(2.54,5.08) B7(3.81,5.08) C1(-3.81,3.81) C2(-2.54,3.81) C3(-1.27,3.81) C4(0,3.81) C5(1.27,3.81) C6(2.54,3.81) C7(3.81,3.81) D1(-3.81,2.54) D2(-2.54,2.54) D3(-1.27,2.54) D4(0,2.54) D5(1.27,2.54) D6(2.54,2.54) D7(3.81,2.54) E1(-3.81,1.27) E2(-2.54,1.27) E3(-1.27,1.27) E4(0,1.27) E5(1.27,1.27) E6(2.54,1.27) E7(3.81,1.27) F1(-3.81,0) F2(-2.54,0) F3(-1.27,0) F4(0,0) F5(1.27,0) F6(2.54,0) F7(3.81,0) G1(-3.81,-1.27) G2(-2.54,-1.27) G3(-1.27,-1.27) G4(0,-1.27) G5(1.27,-1.27) G6(2.54,-1.27) G7(3.81,-1.27) H1(-3.81,-2.54) H2(-2.54,-2.54) H3(-1.27,-2.54) H4(0,-2.54) H5(1.27,-2.54) H6(2.54,-2.54) H7(3.81,-2.54) J1(-3.81,-3.81) J2(-2.54,-3.81) J3(-1.27,-3.81) J4(0,-3.81) J5(1.27,-3.81) J6(2.54,-3.81) J7(3.81,-3.81) K1(-3.81,-5.08) K2(-2.54,-5.08) K3(-1.27,-5.08) K4(0,-5.08) K5(1.27,-5.08) K6(2.54,-5.08) K7(3.81,-5.08) L1(-3.81,-6.35) L2(-2.54,-6.35) L3(-1.27,-6.35) L4(0,-6.35) L5(1.27,-6.35) L6(2.54,-6.35) L7(3.81,-6.35)
  silkscreen extent -5.1,-7.5 4.5,7.5, body extent -4.5,-7.5 4.5,7.5, height 2.02
BGA100P9X9-81A [mm]
  round 0.2 smd: A1(-2.5,2.5) A2(-2,2.5) A3(-1.5,2.5) A4(-1,2.5) A5(-0.5,2.5) A6(0,2.5) A7(0.5,2.5) A8(1,2.5) A9(1.5,2.5) A10(2,2.5) A11(2.5,2.5) B1(-2.5,2) B2(-2,2) B3(-1.5,2) B4(-1,2) B5(-0.5,2) B6(0,2) B7(0.5,2) B8(1,2) B9(1.5,2) B10(2,2) B11(2.5,2) C1(-2.5,1.5) C2(-2,1.5) C3(-1.5,1.5) C4(-1,1.5) C5(-0.5,1.5) C6(0,1.5) C7(0.5,1.5) C8(1,1.5) C9(1.5,1.5) C10(2,1.5) C11(2.5,1.5) D1(-2.5,1) D2(-2,1) D3(-1.5,1) D4(-1,1) D5(-0.5,1) D6(0,1) D7(0.5,1) D8(1,1) D9(1.5,1) D10(2,1) D11(2.5,1) E1(-2.5,0.5) E2(-2,0.5) E3(-1.5,0.5) E4(-1,0.5) E5(-0.5,0.5) E6(0,0.5) E7(0.5,0.5) E8(1,0.5) E9(1.5,0.5) E10(2,0.5) E11(2.5,0.5) F1(-2.5,0) F2(-2,0) F3(-1.5,0) F4(-1,0) F5(-0.5,0) F6(0,0) F7(0.5,0) F8(1,0) F9(1.5,0) F10(2,0) F11(2.5,0) G1(-2.5,-0.5) G2(-2,-0.5) G3(-1.5,-0.5) G4(-1,-0.5) G5(-0.5,-0.5) G6(0,-0.5) G7(0.5,-0.5) G8(1,-0.5) G9(1.5,-0.5) G10(2,-0.5) G11(2.5,-0.5) H1(-2.5,-1) H2(-2,-1) H3(-1.5,-1) H4(-1,-1) H5(-0.5,-1) H6(0,-1) H7(0.5,-1) H8(1,-1) H9(1.5,-1) H10(2,-1) H11(2.5,-1) J1(-2.5,-1.5) J2(-2,-1.5) J3(-1.5,-1.5) J4(-1,-1.5) J5(-0.5,-1.5) J6(0,-1.5) J7(0.5,-1.5) J8(1,-1.5) J9(1.5,-1.5) J10(2,-1.5) J11(2.5,-1.5) K1(-2.5,-2) K2(-2,-2) K3(-1.5,-2) K4(-1,-2) K5(-0.5,-2) K6(0,-2) K7(0.5,-2) K8(1,-2) K9(1.5,-2) K10(2,-2) K11(2.5,-2) L1(-2.5,-2.5) L2(-2,-2.5) L3(-1.5,-2.5) L4(-1,-2.5) L5(-0.5,-2.5) L6(0,-2.5) L7(0.5,-2.5) L8(1,-2.5) L9(1.5,-2.5) L10(2,-2.5) L11(2.5,-2.5)
  silkscreen extent -3.78,-3 3,3, body extent -3,-3 3,3, height 0.9
"CAP 0201_0603" [mm] "Chip Capacitor, 2-Leads, Body 0.60x0.30mm, IPC Medium Density"
  rect 0.4x0.35 smd: 1(-0.31,0) 2(0.31,0)
  silkscreen extent -0.67,-0.33 0.67,0.33, body extent -0.3,-0.15 0.3,0.15, height 0.3
"CAP 0603_1608" [mm] "Chip Capacitor, 2-Leads, Body 1.60x0.80mm, IPC Medium Density"
  rect 0.9x1 smd: 1(-0.675,0) 2(0.675,0)
  silkscreen extent -1.4,-0.7 1.4,0.7, body extent -0.8,-0.41 0.8,0.41, height 0.82
"CAP 0805_2012" [mm] "Chip Capacitor, 2-Leads, Body 2.00x1.20mm, IPC Medium Density"
  rect 1.3x1.4 smd: 1(-0.8,0) 2(0.8,0)
  silkscreen extent -1.7,-0.9 1.7,0.9, body extent -1,-0.64 1,0.64, height 1.26
"CAP 01005_0402" [mm] "Chip Capacitor, 2-Leads, Body 0.30x0.15mm, IPC Medium Density"
  rect 0.18x0.23 smd: 1(-0.19,0) 2(0.19,0)
  silkscreen extent -0.4,-0.22 0.4,0.22, body extent -0.2,-0.1 0.2,0.1, height 0.19
DF5220S08H [mm]
  rect 0.5x1 smd: 1(-7.6,1.11) 2(-6.8,1.11) 3(-6,1.11) 4(-5.2,1.11) 5(-4.4,1.11) 6(-3.6,1.11) 7(-2.8,1.11) 8(-2,1.11) 9(-1.2,1.11) 10(-0.4,1.11) 11(0.4,1.11) 12(1.2,1.11) 13(2,1.11) 14(2.8,1.11) 15(3.6,1.11) 16(4.4,1.11) 17(5.2,1.11) 18(6,1.11) 19(6.8,1.11) 20(7.6,1.11)
  rect 0.9x1.6 smd: 21(-8.85,-0.81) 22(8.85,-0.81)
  silkscreen extent -9.1,-1.51 9.1,1.26, body extent -9.1,-1.38 9.1,1.39, height 1.6
IPEX_20682-020E-02 [mm]
  rect 0.2x0.6 smd: 1(-3.8,0) 2(-3.4,0) 3(-3,0) 4(-2.6,0) 5(-2.2,0) 6(-1.8,0) 7(-1.4,0) 8(-1,0) 9(-0.6,0) 10(-0.2,0) 11(0.2,0) 12(0.6,0) 13(1,0) 14(1.4,0) 15(1.8,0) 16(2.2,0) 17(2.6,0) 18(3,0) 19(3.4,0) 20(3.8,0)
  rect 0.71x1.3 smd: S1(-6.445,-0.7) S2(6.445,-0.7)
  rect 0.71x1.85 smd: S3(-6.445,-3.025) S4(6.445,-3.025)
  rect 0.55x0.55 smd: S5(-2.4,-0.825) S6(0,-0.825) S7(2.4,-0.825)
  rect 0.45x0.58 smd: S8(-2.8,0.84) S9(-0.8,0.84) S10(0.8,0.84) S11(2.8,0.84)
  rect 0.55x0.7 smd: S12(-4.7,-0.05) S13(4.7,-0.05)
  silkscreen extent -6.6,-3.75 6.6,0.97, body extent -6.6,-3.68 6.6,1.05, height 0.82
IPEX_20682-030E-02 [mm]
  rect 0.2x0.6 smd: 1(-5.8,0) 2(-5.4,0) 3(-5,0) 4(-4.6,0) 5(-4.2,0) 6(-3.8,0) 7(-3.4,0) 8(-3,0) 9(-2.6,0) 10(-2.2,0) 11(-1.8,0) 12(-1.4,0) 13(-1,0) 14(-0.6,0) 15(-0.2,0) 16(0.2,0) 17(0.6,0) 18(1,0) 19(1.4,0) 20(1.8,0) 21(2.2,0) 22(2.6,0) 23(3,0) 24(3.4,0) 25(3.8,0) 26(4.2,0) 27(4.6,0) 28(5,0) 29(5.4,0) 30(5.8,0)
  rect 0.71x1.3 smd: S1(-8.445,-0.7) S2(8.445,-0.7)
  rect 0.71x1.85 smd: S3(-8.445,-3.025) S4(8.445,-3.025)
  rect 0.55x0.55 smd: S5(-4.8,-0.825) S6(-2.4,-0.825) S7(0,-0.825) S14(2.4,-0.825) S15(4.8,-0.825)
  rect 0.45x0.58 smd: S8(-6,0.84) S9(-4.4,0.84) S10(-2.8,0.84) S11(-0.8,0.84) S16(0.8,0.84) S17(2.8,0.84) S18(6,0.84) S19(4.4,0.84)
  rect 0.55x0.7 smd: S12(-6.7,-0.05) S13(6.7,-0.05)
  silkscreen extent -8.6,-3.75 8.6,0.97
"LED 0603_1608 GREEN" [mm] "Chip Diode, 2-Leads, Body 1.60x0.80mm, IPC Medium Density"
  rect 0.8x0.8 smd: 1(-0.75,0) 2(0.75,0)
  silkscreen extent -1.52,-0.7 1.52,0.7, body extent -0.8,-0.4 0.8,0.4, height 0.53
"RES 0201_0603" [mm] "Chip Resistor, 2-Leads, Body 0.60x0.30mm, IPC Medium Density"
  rect 0.44x0.35 smd: 1(-0.325,0) 2(0.325,0)
  silkscreen extent -0.7,-0.33 0.7,0.33, body extent -0.3,-0.15 0.3,0.15, height 0.21
"RES 0402_1005" [mm] "Chip Resistor, 2-Leads, Body 1.0x0.5mm, IPC Medium Density"
  rect 0.75x0.6 smd: 1(-0.575,0) 2(0.575,0)
  silkscreen extent -1.14,-0.51 1.14,0.51, body extent -0.5,-0.25 0.5,0.25, height 0.35
SOP65P490X110-8N [mm]
  rrect25% 1.51x0.5 smd: 1(-2.155,0.975) 2(-2.155,0.325) 3(-2.155,-0.325) 4(-2.155,-0.975) 5(2.155,-0.975) 6(2.155,-0.325) 7(2.155,0.325) 8(2.155,0.975)
  silkscreen extent -3.6,-1.55 1.5,1.55
WCAP-PHGP_L7.3W4.3H1.9 [mm] "Aluminum Polymer Capacitors, body 7.3x4.3mm"
  rect 2.4x2.8 smd: 1(3.2,0) 2(-3.2,0)
  silkscreen extent -3.75,-2.25 5.25,2.25, body extent -3.65,-2.15 3.65,2.15, height 1.9
WE-CBF_0603 [mm] "SMD EMI Suppression Ferrite  Bead, body 1.60x0.80mm"
  rect 0.75x0.7 smd: 1(-0.725,0) 2(0.725,0)
  body extent -0.8,-0.4 0.8,0.4, height 0.8
"WE-CBF_0603_High Current" [mm] "SMD EMI Suppression Ferrite  Bead, body 1.60x0.80mm"
  rect 0.95x0.7 smd: 1(-0.825,0) 2(0.825,0)
  body extent -0.8,-0.4 0.8,0.4, height 0.8
WE-XTAL_CFPX-218 [mm] "Quartz Crystal, size CFPX-218, body 2.5x2mm"
  rect 1x0.9 smd: 1(-0.825,-0.613) 2(0.825,-0.613) 3(0.825,0.613) 4(-0.825,0.613)
  silkscreen extent -1.85,-0.65 -1.65,-0.45, body extent -1.25,-1 1.25,1, height 0.55
WQFN_04BQAR_TEX [mil]
  rect 10x32 smd paste+0 mask+0: 1(-9.85,57) 7(-9.85,-57) 8(9.85,-57) 14(9.85,57)
  rect 32x10 smd paste+0 mask+0: 2(-47,39.38) 3(-47,19.69) 4(-47,0) 5(-47,-19.69) 6(-47,-39.38) 9(47,-39.38) 10(47,-19.69) 11(47,0) 12(47,19.69) 13(47,39.38)
  rect 43x63 smd paste+0 mask+0: 15(0,0)
  silkscreen extent -56,-66 83,66, body extent -51,-61 51,61, height 32

## Part data
C1 C2: library part GRM033R61E104KE14J, "CAP CER 0.1UF 25V X5R 0201", Device Package="0201 (0603 Metric)", Manufacturer="Murata Electronics", Operating Temperature="-55°C ~ 85°C", Supplier Part Number 1=490-14571-1-ND, Temperature Coefficient=X5R, Tolerance=±10%, Voltage - Rated=25V, Applications="General Purpose", Capacitance="0.1 µF", ComponentLink1Description=Datasheet, ComponentLink1URL=https://search.murata.co.jp/Ceramy/image/img/A01X/G101/ENG/GRM033R61E104KE14-01.pdf, ComponentLink2Description="DigiKey Link", ComponentLink2URL=https://www.digikey.com/en/products/detail/murata-electronics/GRM033R61E104KE14J/4904732, LastUpdated="2022-04-12 22:02:08", Lifecycle Status=Active, Minimum Order=1, Mounting Type="Surface Mount, MLCC", Package / Case="0201 (0603 Metric)", Packaging=TapeAndReel, Part Number=GRM033R61E104KE14J, Part Status=Active, PartId=80, Price=0.01, Series=GRM, Size / Dimension="0.024\" L x 0.012\" W (0.60mm x 0.30mm)", Supplier 1=DigiKey, Thickness (Max)="0.013\" (0.33mm)"
C3 C12 C54 C55 C56 C57: library part GRM0335C1E100JA01D, "CAP CER 10PF 25V C0G/NP0 0201", Device Package="0201 (0603 Metric)", Manufacturer="Murata Electronics", Operating Temperature="-55°C ~ 125°C", Supplier Part Number 1=490-8607-1-ND, Temperature Coefficient="C0G, NP0", Tolerance=±5%, Voltage - Rated=25V, Applications="General Purpose", Capacitance="10 pF", ComponentLink1Description=Datasheet, ComponentLink1URL=https://search.murata.co.jp/Ceramy/image/img/A01X/G101/ENG/GRM0335C1E100JA01-01.pdf, ComponentLink2Description="DigiKey Link", ComponentLink2URL=https://www.digikey.com/en/products/detail/murata-electronics/GRM0335C1E100JA01D/4358173, LastUpdated="2022-04-12 22:02:08", Lifecycle Status=Active, Minimum Order=1, Mounting Type="Surface Mount, MLCC", Package / Case="0201 (0603 Metric)", Packaging=CutTape, Part Number=GRM0335C1E100JA01D, Part Status=Active, PartId=180, Price=0.01, Series=GRM, Size / Dimension="0.024\" L x 0.012\" W (0.60mm x 0.30mm)", Supplier 1=DigiKey, Thickness (Max)="0.013\" (0.33mm)"
C4 C5 C6 C7 C8 C9 C10 C11 C13 C14 C16 C17 C18 C19 C21 C22 C23 C24 C26 C27 C28 C29 C31 C32: library part CM02X5R104M10AH, "CAP CER 0.1UF 10V X5R 01005", Device Package="01005 (0402 Metric)", Manufacturer="KYOCERA AVX", Operating Temperature="-55°C ~ 85°C", Supplier Part Number 1=1253-CM02X5R104M10AHCT-ND, Temperature Coefficient=X5R, Tolerance=±20%, Voltage - Rated=10V, Applications="General Purpose", Capacitance="0.1 µF", ComponentLink1Description=Datasheet, ComponentLink1URL=https://ele.kyocera.com/assets/products/capacitor/CM_Series_e.pdf, ComponentLink2Description="DigiKey Link", ComponentLink2URL=https://www.digikey.com/en/products/detail/kyocera-avx/CM02X5R104M10AH/10815098, LastUpdated="2022-04-12 23:03:58", Lifecycle Status=Active, Minimum Order=1, Mounting Type="Surface Mount, MLCC", Package / Case="01005 (0402 Metric)", Packaging=TapeAndReel, Part Number=CM02X5R104M10AH, Part Status=Active, Price=0.01, Series=CM, Size / Dimension="0.016\" L x 0.008\" W (0.40mm x 0.20mm)", Supplier 1=DigiKey, Thickness (Max)="0.009\" (0.22mm)"
C15 C20 C25 C30 C33 C34 C35 C50 C58 C59: library part GRM188R61C106MA73D, "CAP CER 10UF 16V X5R 0603", Device Package="0603 (1608 Metric)", Manufacturer="Murata Electronics", Operating Temperature="-55°C ~ 85°C", Supplier Part Number 1=490-7201-1-ND, Temperature Coefficient=X5R, Tolerance=±20%, Voltage - Rated=16V, Applications="General Purpose", Capacitance="10 µF", ComponentLink1Description=Datasheet, ComponentLink1URL=https://www.murata.com/~/media/webrenewal/support/library/catalog/products/capacitor/mlcc/c02e.ashx?la=en-us, ComponentLink2Description="DigiKey Link", ComponentLink2URL=https://www.digikey.com/en/products/detail/murata-electronics/GRM188R61C106MA73D/3900480, LastUpdated="2022-04-12 22:07:55", Lifecycle Status=Active, Minimum Order=1, Mounting Type="Surface Mount, MLCC", Package / Case="0603 (1608 Metric)", Packaging=TapeAndReel, Part Number=GRM188R61C106MA73D, Part Status=Active, PartId=15141, Price=0.04, Series=GRM, Size / Dimension="0.063\" L x 0.031\" W (1.60mm x 0.80mm)", Supplier 1=DigiKey, Thickness (Max)="0.039\" (1.00mm)"
C36 C37 C38 C51: library part GRM21BR60J107ME15K, "CAP CER 100UF 6.3V X5R 0805", Device Package="0805 (2012 Metric)", Manufacturer="Murata Electronics", Operating Temperature="-55°C ~ 85°C", Supplier Part Number 1=490-GRM21BR60J107ME15KCT-ND, Temperature Coefficient=X5R, Tolerance=±20%, Voltage - Rated=6.3V, Applications="General Purpose", Capacitance="100 µF", ComponentLink1Description=Datasheet, ComponentLink1URL=https://search.murata.co.jp/Ceramy/image/img/A01X/G101/ENG/GRM21BR60J107ME15-01A.pdf, ComponentLink2Description="DigiKey Link", ComponentLink2URL=https://www.digikey.com/en/products/detail/murata-electronics/GRM21BR60J107ME15K/9887675, LastUpdated="2022-04-12 22:10:32", Lifecycle Status=Active, Minimum Order=1, Mounting Type="Surface Mount, MLCC", Package / Case="0805 (2012 Metric)", Packaging=TapeAndReel, Part Number=GRM21BR60J107ME15K, Part Status=Active, PartId=39832, Price=0.42, Series=GRM, Size / Dimension="0.079\" L x 0.049\" W (2.00mm x 1.25mm)", Supplier 1=DigiKey, Thickness (Max)="0.057\" (1.45mm)"
C39 C40 C41 C42 C44 C47 C48 C49 C53: library part GRM033R61A104KE15D, "CAP CER 0.1UF 10V X5R 0201", Device Package="0201 (0603 Metric)", Manufacturer="Murata Electronics", Operating Temperature="-55°C ~ 85°C", Supplier Part Number 1=490-5881-1-ND, Temperature Coefficient=X5R, Tolerance=±10%, Voltage - Rated=10V, Applications="General Purpose", Capacitance="0.1 µF", ComponentLink1Description=Datasheet, ComponentLink1URL=https://www.murata.com/~/media/webrenewal/support/library/catalog/products/capacitor/mlcc/c02e.ashx?la=en-us, ComponentLink2Description="DigiKey Link", ComponentLink2URL=https://www.digikey.com/en/products/detail/murata-electronics/GRM033R61A104KE15D/2269163, LastUpdated="2022-04-12 22:01:55", Lifecycle Status=Active, Minimum Order=1, Mounting Type="Surface Mount, MLCC", Package / Case="0201 (0603 Metric)", Packaging=CutTape, Part Number=GRM033R61A104KE15D, Part Status=Active, PartId=1641, Price=0.01, Series=GRM, Size / Dimension="0.024\" L x 0.012\" W (0.60mm x 0.30mm)", Supplier 1=DigiKey, Thickness (Max)="0.013\" (0.33mm)"
C43 C45 C46 C52: library part CC0201JRNPO8BN200, "CAP CER 20PF 25V C0G/NPO 0201", Device Package="0201 (0603 Metric)", Manufacturer=Yageo, Operating Temperature="-55°C ~ 125°C", Supplier Part Number 1=311-3315-1-ND, Temperature Coefficient="C0G, NP0", Tolerance=±5%, Voltage - Rated=25V, Applications="General Purpose", Capacitance="20 pF", ComponentLink1Description=Datasheet, ComponentLink1URL=https://www.yageo.com/upload/media/product/productsearch/datasheet/mlcc/UPY-GP_NP0_16V-to-50V_17.pdf, ComponentLink2Description="DigiKey Link", ComponentLink2URL=https://www.digikey.com/en/products/detail/yageo/CC0201JRNPO8BN200/5883132, LastUpdated="2022-04-12 22:02:06", Lifecycle Status=Active, Minimum Order=1, Mounting Type="Surface Mount, MLCC", Package / Case="0201 (0603 Metric)", Packaging=CutTape, Part Number=CC0201JRNPO8BN200, Part Status=Active, PartId=353, Price=0.01, Series=CC, Size / Dimension="0.024\" L x 0.012\" W (0.60mm x 0.30mm)", Supplier 1=DigiKey, Thickness (Max)="0.013\" (0.33mm)"
C60: library part 875015119006, "WCAP-PHGP Aluminum Polymer Capacitor, H-Chip SMT, L7.3W4.3H1.9mm, 220uF, 6.3V", Capacitance Tolerance=+/-20%, Leakage Current=138.6uA, Manufacturer="Wurth Elektronik", Operating Temperature Max=105°C, Operating Temperature Min=-55°C, Rated Voltage (DC)=6.3V, Ripple Current=5100mA, Capacitance=220uF, Category="Aluminum Polymer Capacitors", ComponentLink1Description="Manufacturer Link", ComponentLink1URL=https://www.we-online.com/redexpert/article/875015119006?ad, ComponentLink2Description=Datasheet, ComponentLink2URL=https://www.we-online.com/redexpert/spec/875015119006?ad, Dissipation Factor=6%, Endurance=2000h, ESR=15mOhm, Height=1.9mm, Length=7.3mm, Manufacturer Part Number=875015119006, Match Code=WCAP-PHGP, Mount="Surface Mount", Packaging="Tape and Reel", Technical Reference=PSE2917221M6R3DHCT2HT19, Width=4.3mm
D8 D9 D10: library part 150060GS55040, "LED GREEN DIFFUSED 0603 SMD", Current - Test=20mA, Device Package="0603 (1608 Metric)", Lens Color=0.50mm, Manufacturer="Würth Elektronik", Millicandela Rating=430mcd, Supplier Part Number 1=732-12014-1-ND, Voltage - Forward (Vf) (Typ)=3.2V, Color=Green, ComponentLink1Description=Datasheet, ComponentLink1URL=https://www.we-online.de/web/en/index.php/download/media/07_electronic_components/download_center_1/application_notes_berichte/ano002_leds___the_future_of_horticultural_lighting/ANO002b_EN_LEDs_The_Future_of_Horticultural_Lighting.pdf, ComponentLink2Description="DigiKey Link", ComponentLink2URL=https://www.digikey.com/en/products/detail/würth-elektronik/150060GS55040/8557179, Configuration=Standard, Height (Max)=0.50mm, LastUpdated="2022-04-12 22:51:58", Lens Size="1.00mm x 0.80mm", Lens Style="Rectangle with Flat Top", Lens Transparency=Diffused, Lifecycle Status=Active, Minimum Order=1, Mounting Type="Surface Mount", Package / Case="0603 (1608 Metric)", Packaging=TapeAndReel, Part Number=150060GS55040, Part Status=Active, PartId=673, Price=0.13, Series=WL-SMDC, Size / Dimension="1.60mm L x 0.80mm W", Supplier 1=DigiKey, Supplier Device Package="0603 (1608 Metric)", Viewing Angle=140°, Wavelength - Dominant=525nm, Wavelength - Peak=520nm
FB1 FB2 FB3 FB4: library part 742792602, "WE-CBF SMT EMI Suppression Ferrite Bead, size 0603, 60Ohm, 3A", Case/Size Code=0603, DC Resistance Max=0.04Ohm, Manufacturer="Wurth Elektronik", Operating Temperature Max=125°C, Operating Temperature Min=-55°C, Rated Current=3A, Category="Ferrites for PCB Assembly", ComponentLink1Description="Manufacturer Link", ComponentLink1URL=http://www.we-online.de, ComponentLink2Description=Datasheet, ComponentLink2URL=https://www.we-online.com/catalog/datasheet/742792602.pdf, Height=0.8mm, Impedance @100MHz=60Ohm, Impedance Max=110Ohm, Impedance Max Test Condition=600MHz, Length=1.6mm, Manufacturer Part Number=742792602, Match Code=WE-CBF, Mount=SMT, Packaging="Tape and Reel", Type="High Current", Width=0.8mm
FB5 FB6: library part 742792662, "WE-CBF SMT EMI Suppression Ferrite Bead, size 0603, 1000Ohm, 0.83A", Case/Size Code=0603, DC Resistance Max=0.3Ohm, Manufacturer="Wurth Elektronik", Operating Temperature Max=125°C, Operating Temperature Min=-55°C, Rated Current=0.83A, Category="Ferrites for PCB Assembly", ComponentLink1Description="Manufacturer Link", ComponentLink1URL=http://www.we-online.de, ComponentLink2Description=Datasheet, ComponentLink2URL=https://www.we-online.com/catalog/datasheet/742792662.pdf, Height=0.8mm, Impedance @100MHz=1000Ohm, Impedance Max=1050Ohm, Impedance Max Test Condition=120MHz, Length=1.6mm, Manufacturer Part Number=742792662, Match Code=WE-CBF, Mount=SMT, Packaging="Tape and Reel", Type="Wide Band", Width=0.8mm
J1 J2 J3: "Cabline-CAII Rece. Ass'y", Package=None, Availability=Unavailable, MF="{'manufacturer': u'I-PEX'}", Price=None
  J1: MP=20682-020E-02
  J2 J3: MP=20682-030E-02
J4: "Connector", Manufacturer_Name=Hirose, Datasheet Link=https://www.mouser.com/datasheet/2/185/DF52_catalog-939321.pdf, Height=1mm, Manufacturer_Part_Number=DF52-20S-0.8H
R1 R42 R43 R44 R45: library part CRCW02011M00FKED, "RES SMD 1M OHM 1% 1/20W 0201", Device Package="0201 (0603 Metric)", Manufacturer="Vishay Dale", Operating Temperature="-55°C ~ 155°C", Power (Watts)="0.05W, 1/20W", Supplier Device Package=0201, Supplier Part Number 1=541-1.00MAABCT-ND, Temperature Coefficient=±100ppm/°C, Tolerance=±1%, ComponentLink1Description=Datasheet, ComponentLink1URL=http://www.vishay.com/docs/20052/crcw0201e3.pdf, ComponentLink2Description="DigiKey Link", ComponentLink2URL=https://www.digikey.com/en/products/detail/vishay-dale/CRCW02011M00FKED/1968003, Composition="Thick Film", Height - Seated (Max)="0.010\" (0.26mm)", LastUpdated="2022-04-12 22:16:01", Lifecycle Status=Active, Minimum Order=1, Number of Terminations=2, Package / Case="0201 (0603 Metric)", Packaging=TapeAndReel, Part Number=CRCW02011M00FKED, Part Status=Active, PartId=30, Price=0.03, Resistance="1 MOhms", Series=CRCW, Size / Dimension="0.024\" L x 0.012\" W (0.60mm x 0.30mm)", Supplier 1=DigiKey
R2 R3 R6 R8 R9 R10 R11 R12 R13 R15 R16 R17 R18 R19 R21: library part ERJ-U01J272C, "RES 2.7K OHM 5% 1/20W 0201 SMD", Device Package="0201 (0603 Metric)", Manufacturer="Panasonic Electronic Components", Operating Temperature="-55°C ~ 125°C", Power (Watts)="0.05W, 1/20W", Supplier Device Package=0201, Supplier Part Number 1=10-ERJ-U01J272CCT-ND, Temperature Coefficient=±200ppm/°C, Tolerance=±5%, ComponentLink1Description=Datasheet, ComponentLink1URL=https://industrial.panasonic.com/cdbs/www-data/pdf/RDP0000/AOA0000C334.pdf, ComponentLink2Description="DigiKey Link", ComponentLink2URL=https://www.digikey.com/en/products/detail/panasonic-electronic-components/ERJ-U01J272C/11641374, Composition="Thick Film", Features=Anti-Sulfur, Height - Seated (Max)="0.010\" (0.26mm)", LastUpdated="2022-04-12 22:15:26", Lifecycle Status=Active, Minimum Order=1, Number of Terminations=2, Package / Case="0201 (0603 Metric)", Packaging=TapeAndReel, Part Number=ERJ-U01J272C, Part Status=Active, PartId=64645, Price=0.04, Resistance="2.7 kOhms", Series=ERJ-U01, Size / Dimension="0.024\" L x 0.012\" W (0.60mm x 0.30mm)", Supplier 1=DigiKey
R4 R46: library part ERJ-U01F1003C, "RES 100K OHM 1% 1/20W 0201 SMD", Device Package="0201 (0603 Metric)", Manufacturer="Panasonic Electronic Components", Operating Temperature="-55°C ~ 125°C", Power (Watts)="0.05W, 1/20W", Supplier Device Package=0201, Supplier Part Number 1=10-ERJ-U01F1003CCT-ND, Temperature Coefficient=±200ppm/°C, Tolerance=±1%, ComponentLink1Description=Datasheet, ComponentLink1URL=https://industrial.panasonic.com/cdbs/www-data/pdf/RDP0000/AOA0000C334.pdf, ComponentLink2Description="DigiKey Link", ComponentLink2URL=https://www.digikey.com/en/products/detail/panasonic-electronic-components/ERJ-U01F1003C/11631500, Composition="Thick Film", Features=Anti-Sulfur, Height - Seated (Max)="0.010\" (0.26mm)", LastUpdated="2022-04-12 22:15:26", Lifecycle Status=Active, Minimum Order=1, Number of Terminations=2, Package / Case="0201 (0603 Metric)", Packaging=TapeAndReel, Part Number=ERJ-U01F1003C, Part Status=Active, PartId=64617, Price=0.05, Resistance="100 kOhms", Series=ERJ-U01, Size / Dimension="0.024\" L x 0.012\" W (0.60mm x 0.30mm)", Supplier 1=DigiKey
R5: library part ERJ-1GNF1332C, "RES SMD 13.3K OHM 1% 1/20W 0201", Device Package="0201 (0603 Metric)", Manufacturer="Panasonic Electronic Components", Operating Temperature="-55°C ~ 125°C", Power (Watts)="0.05W, 1/20W", Ratings=AEC-Q200, Supplier Device Package=0201, Supplier Part Number 1=P122718CT-ND, Temperature Coefficient=±200ppm/°C, Tolerance=±1%, ComponentLink1Description=Datasheet, ComponentLink1URL=https://industrial.panasonic.com/cdbs/www-data/pdf/RDA0000/AOA0000C304.pdf, ComponentLink2Description="DigiKey Link", ComponentLink2URL=https://www.digikey.com/en/products/detail/panasonic-electronic-components/ERJ-1GNF1332C/2036239, Composition="Thick Film", Features="Automotive AEC-Q200", Height - Seated (Max)="0.010\" (0.26mm)", LastUpdated="2022-04-12 22:15:43", Lifecycle Status=Active, Minimum Order=1, Number of Terminations=2, Package / Case="0201 (0603 Metric)", Packaging=TapeAndReel, Part Number=ERJ-1GNF1332C, Part Status=Active, PartId=2366, Price=0.01, Resistance="13.3 kOhms", Series=ERJ-1GN, Size / Dimension="0.024\" L x 0.012\" W (0.60mm x 0.30mm)", Supplier 1=DigiKey
R7: library part ERJ-1GNF1502C, "RES SMD 15K OHM 1% 1/20W 0201", Device Package="0201 (0603 Metric)", Manufacturer="Panasonic Electronic Components", Operating Temperature="-55°C ~ 125°C", Power (Watts)="0.05W, 1/20W", Ratings=AEC-Q200, Supplier Device Package=0201, Supplier Part Number 1=P122744CT-ND, Temperature Coefficient=±200ppm/°C, Tolerance=±1%, ComponentLink1Description=Datasheet, ComponentLink1URL=https://industrial.panasonic.com/cdbs/www-data/pdf/RDA0000/AOA0000C304.pdf, ComponentLink2Description="DigiKey Link", ComponentLink2URL=https://www.digikey.com/en/products/detail/panasonic-electronic-components/ERJ-1GNF1502C/2036244, Composition="Thick Film", Features="Automotive AEC-Q200", Height - Seated (Max)="0.010\" (0.26mm)", LastUpdated="2022-05-10 16:40:15", Lifecycle Status=Active, Minimum Order=1, Number of Terminations=2, Package / Case="0201 (0603 Metric)", Packaging=TapeAndReel, Part Number=ERJ-1GNF1502C, Part Status=Active, PartId=3474, Price=0.01, Resistance="15 kOhms", Series=ERJ-1GN, Size / Dimension="0.024\" L x 0.012\" W (0.60mm x 0.30mm)", Supplier 1=DigiKey
R14: library part ERJ-1GNF9092C, "RES SMD 90.9K OHM 1% 1/20W 0201", Device Package="0201 (0603 Metric)", Manufacturer="Panasonic Electronic Components", Operating Temperature="-55°C ~ 125°C", Power (Watts)="0.05W, 1/20W", Ratings=AEC-Q200, Supplier Device Package=0201, Supplier Part Number 1=P123196CT-ND, Temperature Coefficient=±200ppm/°C, Tolerance=±1%, ComponentLink1Description=Datasheet, ComponentLink1URL=https://industrial.panasonic.com/cdbs/www-data/pdf/RDA0000/AOA0000C304.pdf, ComponentLink2Description="DigiKey Link", ComponentLink2URL=https://www.digikey.com/en/products/detail/panasonic-electronic-components/ERJ-1GNF9092C/2036335, Composition="Thick Film", Features="Automotive AEC-Q200", Height - Seated (Max)="0.010\" (0.26mm)", LastUpdated="2022-04-12 22:15:43", Lifecycle Status=Active, Minimum Order=1, Number of Terminations=2, Package / Case="0201 (0603 Metric)", Packaging=TapeAndReel, Part Number=ERJ-1GNF9092C, Part Status=Active, PartId=2331, Price=0.01, Resistance="90.9 kOhms", Series=ERJ-1GN, Size / Dimension="0.024\" L x 0.012\" W (0.60mm x 0.30mm)", Supplier 1=DigiKey
R20: library part ERJ-1GNF6042C, "RES SMD 60.4K OHM 1% 1/20W 0201", Device Package="0201 (0603 Metric)", Manufacturer="Panasonic Electronic Components", Operating Temperature="-55°C ~ 125°C", Power (Watts)="0.05W, 1/20W", Ratings=AEC-Q200, Supplier Device Package=0201, Supplier Part Number 1=P123096CT-ND, Temperature Coefficient=±200ppm/°C, Tolerance=±1%, ComponentLink1Description=Datasheet, ComponentLink1URL=https://industrial.panasonic.com/cdbs/www-data/pdf/RDA0000/AOA0000C304.pdf, ComponentLink2Description="DigiKey Link", ComponentLink2URL=https://www.digikey.com/en/products/detail/panasonic-electronic-components/ERJ-1GNF6042C/2036315, Composition="Thick Film", Features="Automotive AEC-Q200", Height - Seated (Max)="0.010\" (0.26mm)", LastUpdated="2022-04-12 22:15:43", Lifecycle Status=Active, Minimum Order=1, Number of Terminations=2, Package / Case="0201 (0603 Metric)", Packaging=TapeAndReel, Part Number=ERJ-1GNF6042C, Part Status=Active, PartId=2409, Price=0.01, Resistance="60.4 kOhms", Series=ERJ-1GN, Size / Dimension="0.024\" L x 0.012\" W (0.60mm x 0.30mm)", Supplier 1=DigiKey
R22: library part ERJ-1GNF3012C, "RES SMD 30.1K OHM 1% 1/20W 0201", Device Package="0201 (0603 Metric)", Manufacturer="Panasonic Electronic Components", Operating Temperature="-55°C ~ 125°C", Power (Watts)="0.05W, 1/20W", Ratings=AEC-Q200, Supplier Device Package=0201, Supplier Part Number 1=P122917CT-ND, Temperature Coefficient=±200ppm/°C, Tolerance=±1%, ComponentLink1Description=Datasheet, ComponentLink1URL=https://industrial.panasonic.com/cdbs/www-data/pdf/RDA0000/AOA0000C304.pdf, ComponentLink2Description="DigiKey Link", ComponentLink2URL=https://www.digikey.com/en/products/detail/panasonic-electronic-components/ERJ-1GNF3012C/2036279, Composition="Thick Film", Features="Automotive AEC-Q200", Height - Seated (Max)="0.010\" (0.26mm)", LastUpdated="2022-04-12 22:16:01", Lifecycle Status=Active, Minimum Order=1, Number of Terminations=2, Package / Case="0201 (0603 Metric)", Packaging=TapeAndReel, Part Number=ERJ-1GNF3012C, Part Status=Active, PartId=21, Price=0.01, Resistance="30.1 kOhms", Series=ERJ-1GN, Size / Dimension="0.024\" L x 0.012\" W (0.60mm x 0.30mm)", Supplier 1=DigiKey
R23 R24 R30 R31 R32 R33: library part AC0402FR-070RL, "RESISTOR 0402 JUMPER ZERO OHM", Device Package="0402 (1005 Metric)", Manufacturer=Yageo, Operating Temperature="-55°C ~ 155°C", Power (Watts)="0.063W, 1/16W", Ratings=AEC-Q200, Supplier Device Package=0402, Supplier Part Number 1=13-AC0402FR-070RLCT-ND, Tolerance=Jumper, ComponentLink1Description=Datasheet, ComponentLink1URL=https://www.yageo.com/upload/media/product/productsearch/datasheet/rchip/PYu-AC_51_RoHS_L_8.pdf, ComponentLink2Description="DigiKey Link", ComponentLink2URL=https://www.digikey.com/en/products/detail/yageo/AC0402FR-070RL/12082398, Composition="Thick Film", Features="Automotive AEC-Q200, Moisture Resistant", Height - Seated (Max)="0.015\" (0.37mm)", LastUpdated="2022-04-12 22:19:37", Lifecycle Status=Active, Minimum Order=1, Number of Terminations=2, Package / Case="0402 (1005 Metric)", Packaging=CutTape, Part Number=AC0402FR-070RL, Part Status=Active, PartId=66976, Price=0.01, Resistance="0 Ohms", Series=AC, Size / Dimension="0.039\" L x 0.020\" W (1.00mm x 0.50mm)", Supplier 1=DigiKey
R34 R35 R36: library part RCS0402680RFKED, "RES SMD 680 OHM 1% 1/5W 0402", Device Package="0402 (1005 Metric)", Manufacturer="Vishay Dale", Operating Temperature="-55°C ~ 155°C", Power (Watts)="0.2W, 1/5W", Ratings=AEC-Q200, Supplier Device Package=0402, Supplier Part Number 1=541-10420-1-ND, Temperature Coefficient=±100ppm/°C, Tolerance=±1%, ComponentLink1Description=Datasheet, ComponentLink1URL=http://www.vishay.com/docs/20065/rcse3.pdf, ComponentLink2Description="DigiKey Link", ComponentLink2URL=https://www.digikey.com/en/products/detail/vishay-dale/RCS0402680RFKED/5867679, Composition="Thick Film", Features="Automotive AEC-Q200, Pulse Withstanding", Height - Seated (Max)="0.016\" (0.40mm)", LastUpdated="2022-04-12 22:21:08", Lifecycle Status=Active, Minimum Order=1, Number of Terminations=2, Package / Case="0402 (1005 Metric)", Packaging=TapeAndReel, Part Number=RCS0402680RFKED, Part Status=Active, PartId=6056, Price=0.01, Resistance="680 Ohms", Series="RCS e3", Size / Dimension="0.039\" L x 0.020\" W (1.00mm x 0.50mm)", Supplier 1=DigiKey
U1: library part CMP-015-00008-4, "VXR7200 DP to MIPI-DSI bridge"
U2: "LTM4643 - Ultrathin Quad ﾎｼModule Regulator with Configurable 3A Output Array", Package=None, Availability=Unavailable, MF="{'manufacturer': u'Linear Technology/Analog'}", MP=LTM4643EY#PBF, Price=None
U4 U5: library part CMP-006-000001-1, "No Description Available", Mfr_Name="Texas Instruments", Copyright="Copyright (C) 2022 Ultra Librarian. All rights reserved.", Design Item ID=TXU0204BQAR, Manufacturer_Part_Number=TXU0204BQAR, RefDes=RefDes, Source=TXU0204BQAR.SchLib, Type=DEV
U7: "2-Channel IﾂｲC Multiplexer Interface 8-TSSOP", Package=None, Availability=Unavailable, MF="{'manufacturer': u'NXP USA'}", MP=PCA9540BDP, Price=None
Y1: library part 830108208409, "WE-XTAL Quartz Crystal, SMT, CFPX-218, 27MHz, +/-10ppm", Frequency Stability=+/-10ppm, Load Capacitance=10pF, Manufacturer="Wurth Elektronik", Operating Temperature="-20 to +70degC", ComponentLink1Description=Manufacturer, ComponentLink1URL=http://www.we-online.de, ComponentLink2Description=Datasheet, ComponentLink2URL=https://katalog.we-online.com/pbs/datasheet/830108208409.pdf, Frequency=27MHz, Frequency Tolerance=+/-10ppm, Manufacturer Part Number=830108208409, Mounting Technology=SMT, Packaging="Tape and Reel", Published Date="July 2020", Size=CFPX-218

## Via types
v1: diameter 0.3, hole 0.15, Top (GND) to Bottom (S), 287 vias
v2: diameter 0.25, hole 0.1, Top (GND) to L2 (HS), 104 vias
v3: diameter 0.25, hole 0.1, L9 (VCC) to Bottom (S), 22 vias
v4: diameter 3, hole 1.9, Top (GND) to Bottom (S), 3 vias
v5: diameter 0.25, hole 0.1, Top (GND) to Bottom (S), 1 vias

## Nets (pads, with @x,y where several pads share a name; then routed paths per layer and width w, separated by ;. In a path a pad name is that pad's centre, name@x,y a point inside that pad or via, vN(x,y) a via of type N, cw(c..) or ccw(c..) an arc to the next point about the centre after c; other vN are vias at no path point)
+1: C51.2 C52.2 FB1.1 FB2.1 FB3.1 FB4.1 U2.J1 U2.K1 U2.K2 | length 8
  Bottom (S) w0.075: v1(27.6,34.39) 34.698,34.39 v1(35.306,33.782)
  other v1: 38.375,30.8 38.375,32.3 36.576,33.782 38.375,33.8 36.576,35.052 38.375,35.3
+1.8: C36.2 C40.2 C42.2 C46.2 J2.2 J3.2 R2.1 R3.1 U2.A1 U2.A2 U2.A3 U4.14 U5.14 | length 17.2
  Bottom (S) w0.075: v1(31.5,47.7) C36.2@31.5,47.8 ; R2.1@39.5,48.425 40.876,48.425 41.126,48.175 43.13,48.175 43.379,47.926 43.379,47.84 43.468,47.75 U4.14@43.748,47.75 ; R3.1@60.5,47.925 62.074,47.925 62.19,47.809 64.194,47.809 64.427,47.576 64.427,47.489 64.516,47.4 U5.14@64.796,47.4
  Bottom (S) w0.1: v1(43.1,51.9) 43.1,50.115 45,48.215 C40.2@45,48.19 45,48.165 44.585,47.75 U4.14@43.748,47.75 ; U5.14@64.796,47.4 65.735,47.4 C42.2@66,47.665 ; C42.2@66,47.69 C42.2@66,47.665 ; v1(66.6,47.5) 66.562,47.538 66.152,47.538 66.15,47.54 66.125,47.54 C42.2@66,47.665
  other v1: 34.036,45.212 35.306,45.212 27.6,45.29 31.4,46.5 32.8,46.5 67.7,51.9
+3.3: C38.2 C39.2 C41.2 C43.2 C44.2 FB5.1 FB6.1 R4.2 R6.2 R8.2 R9.2 R10.2 R11.2 R12.2 R13.2 R15.2 R16.2 R17.2 R18.2 R19.2 R42.2 U2.F1 U2.G1 U2.G2 U4.1 U5.1 U7.3 | length 24.6
  Bottom (S) w0.075: R18.2@48.2,45.025 v3(48.2,45.7) ; U7.3@48.845,48.325 U7.3@49.35,48.325 ; R19.2@48.9,45.025 v3(48.9,45.7) ; R42.2@52.975,32.8 v3(53,32.8)
  Bottom (S) w0.1: v1(38.375,38.675) 38.675,38.975 39.223,38.975 39.398,39.15 42.75,39.15 43.7,38.2 43.727,38.2 ; U4.1@43.748,47.25 44.94,47.25 C39.2@45,47.31 45.11,47.2 v3(45.5,47.2) ; R12.2@44.7,37.2 44.675,37.225 R13.2@44.675,37.6 R15.2@44.675,38.2 43.727,38.2 ; R11.2@46.1,41.525 45.348,41.525 44.575,40.752 44.575,39.048 43.727,38.2 ; v3(47.1,48.3) 47.51,48.3 C44.2@47.6,48.39 47.665,48.325 U7.3@48.845,48.325 ; v3(60,33.5) R6.2@60.675,33.5 ; v3(60,35) R8.2@60.675,35 ; v3(60,37) R9.2@60.675,37 ; v3(60,38.5) R10.2@60.7,38.5 ; U5.1@64.796,46.9 65.625,46.9 66,46.525 C41.2@66,46.5 66.606,46.5 v3(66.623,46.516) ; v3(67.4,35.1) R4.2@67.975,35.1 ; v3(67.4,35.9) R16.2@67.975,35.9 ; v3(67.4,36.6) R17.2@67.975,36.6
  other v1: 27.6,37.39 35.306,37.592 36.576,37.592 36.576,38.862 38.375,39.875
+5: C33.2 C34.2 C35.2 C50.2 C60.1 J1.1 J1.2 J1.3 J2.1 J3.1 J4.2 U2.B3 U2.B4 U2.B5 U2.C6 U2.E3 U2.E4 U2.E5 U2.F6 U2.H3 U2.H4 U2.H5 U2.J6 U2.L3 U2.L4 U2.L5 | length 5.3
  Top (GND) w0.1: v1(31.496,43.942) 31.883,43.942 C50.2@32.1,43.725 32.317,43.942 v1(32.766,43.942) ; v1(32.766,32.512) 33.313,32.512 C35.2@33.4,32.425 33.487,32.512 v1(34.036,32.512) ; v1(32.766,36.322) 33.397,36.322 C34.2@33.4,36.325 33.403,36.322 v1(34.036,36.322) ; v1(32.766,40.132) 33.393,40.132 C33.2@33.4,40.125 33.407,40.132 v1(34.036,40.132)
  other v1: 30,27.5 31.25,27.5 30.8,28.5 30,29.5 31.25,29.5 47.6,30.6 47.2,31.1 48,31.1 71,31.8 31.496,32.512 30.226,35.052 31.496,36.322 30.226,38.862 31.496,40.132 30.226,42.672 34.036,43.942 43.5,51.4 68.1,51.4
AUX_N: C2.1 J1.19 R43.2 | length 3
  L2 (HS) w0.071: v2(54.4,30.825) ccw(c54.283,30.825) 54.366,30.907 cw(c54.559,31.101) 54.286,31.101 54.286,31.689 ccw(c53.987,31.689) 54.198,31.901 cw(c54.409,32.112) 54.111,32.112 54.111,32.269 cw(c54.647,32.269) 54.268,32.648 54.425,32.805 v1(54.425,32.81)
  Bottom (S) w0.1: C2.1@54.4,33.59 54.425,33.565 v1(54.425,32.81)